# EAGLE board Photon-IMU-Shield-Panel-v10 (EAGLE 7.3.0), part 1 of 2
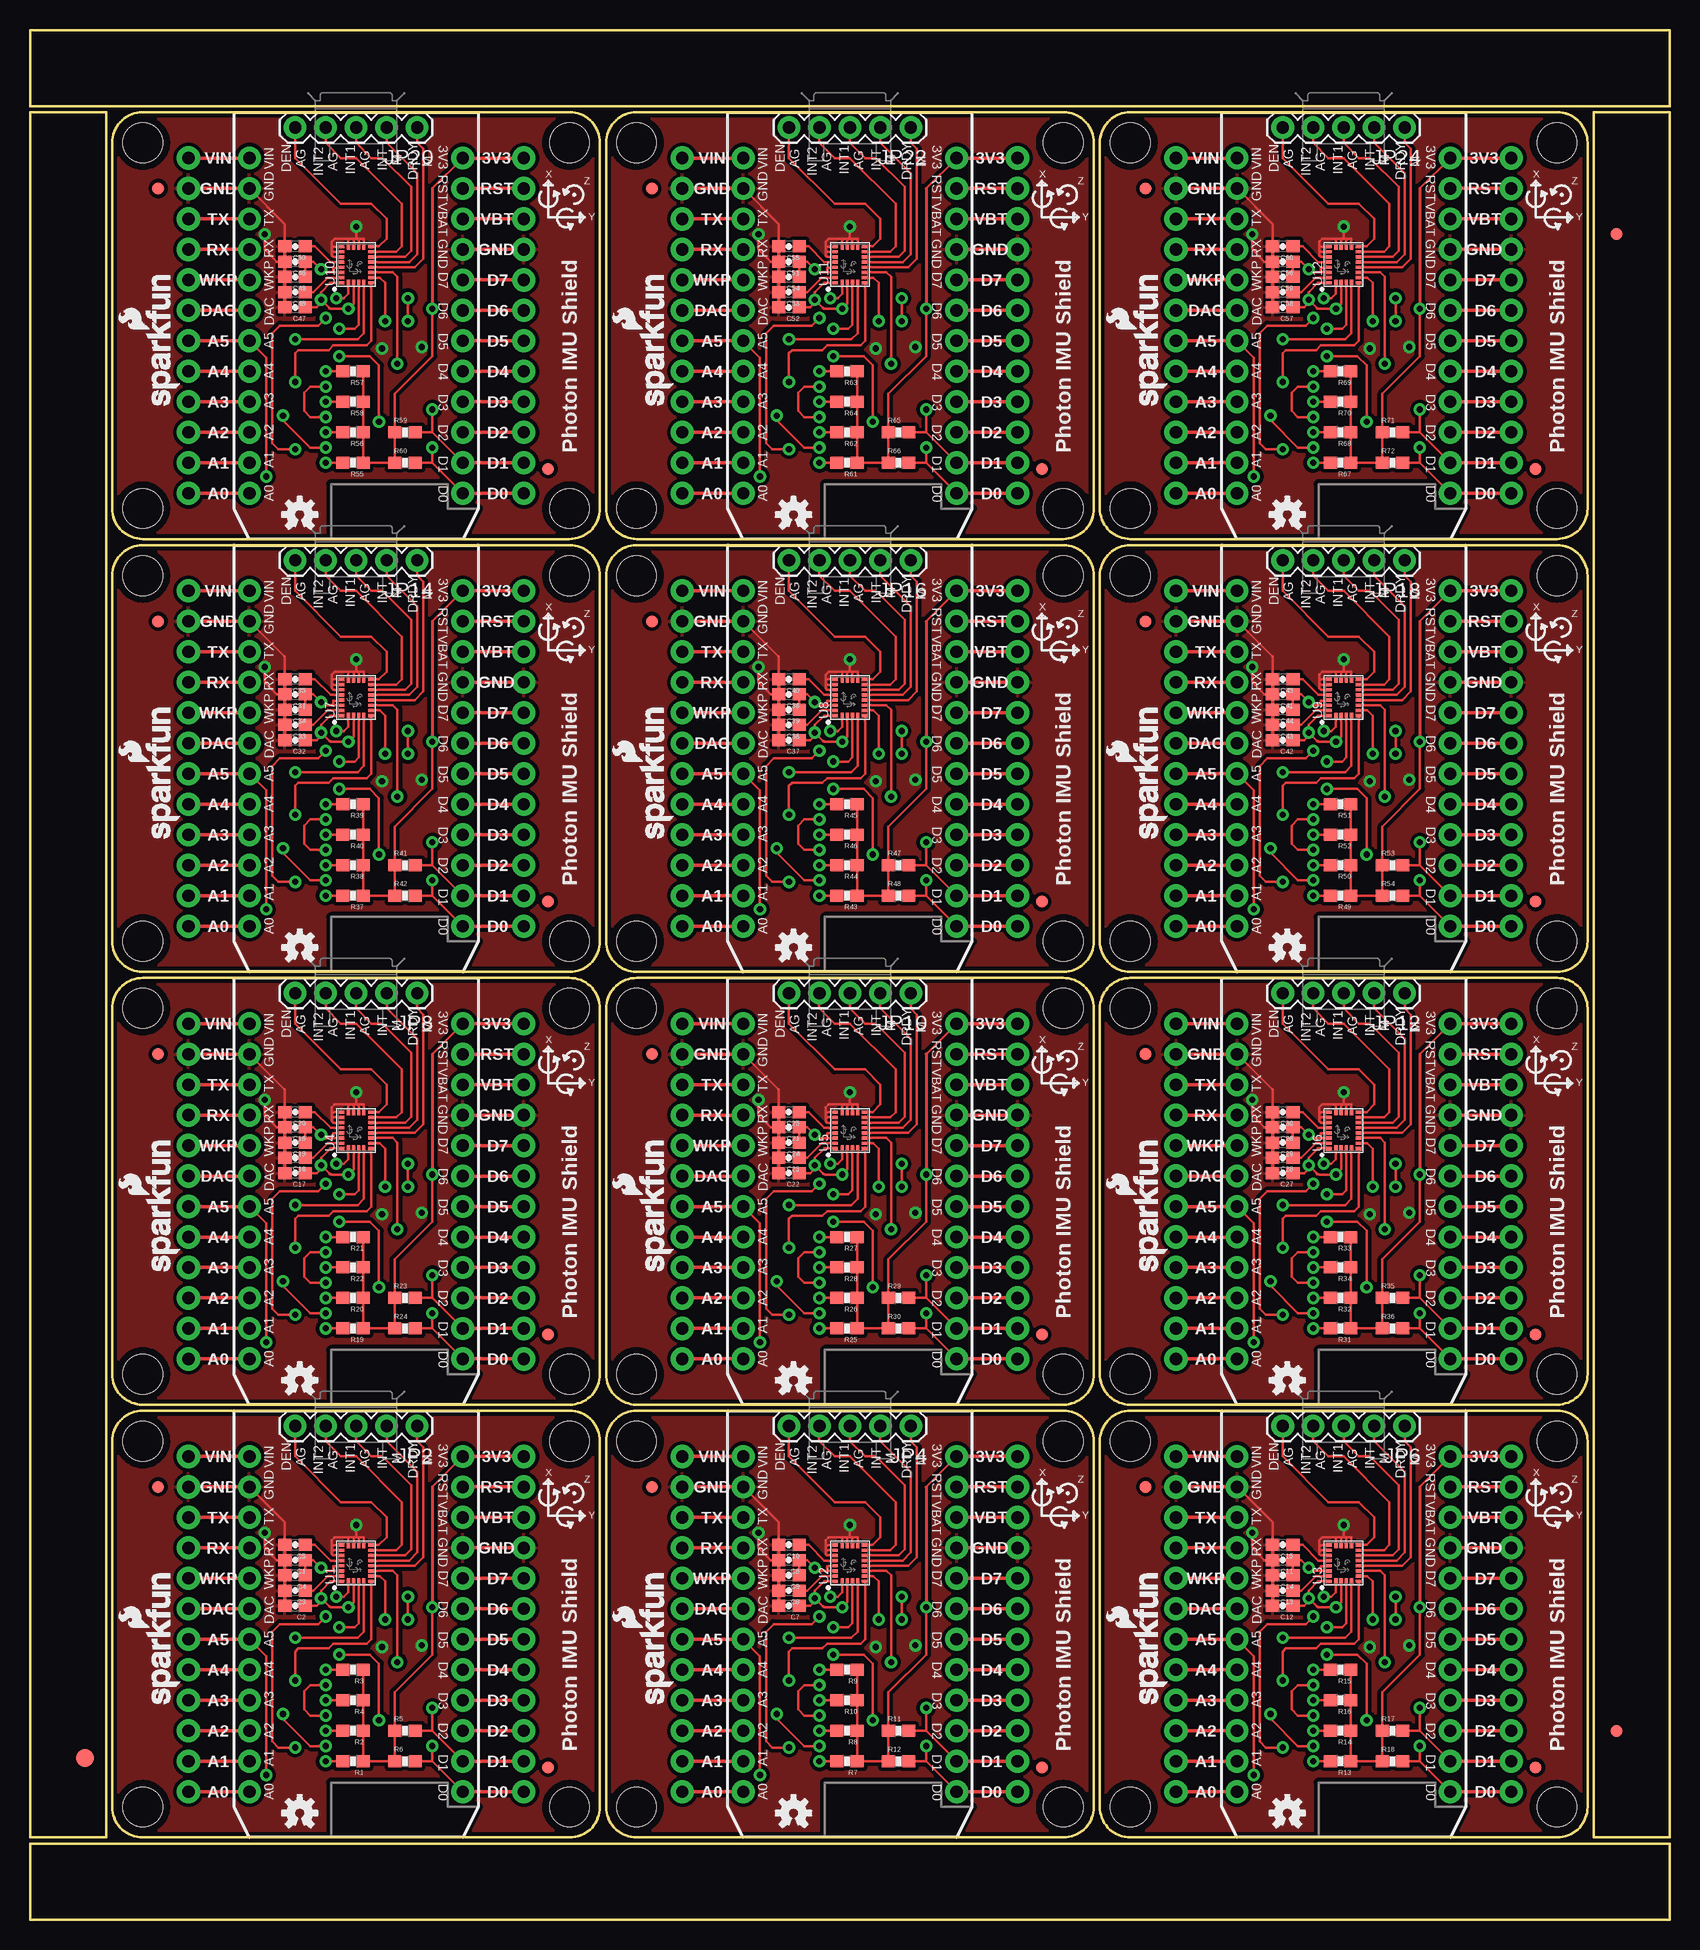
[diagram p0: board, top side]
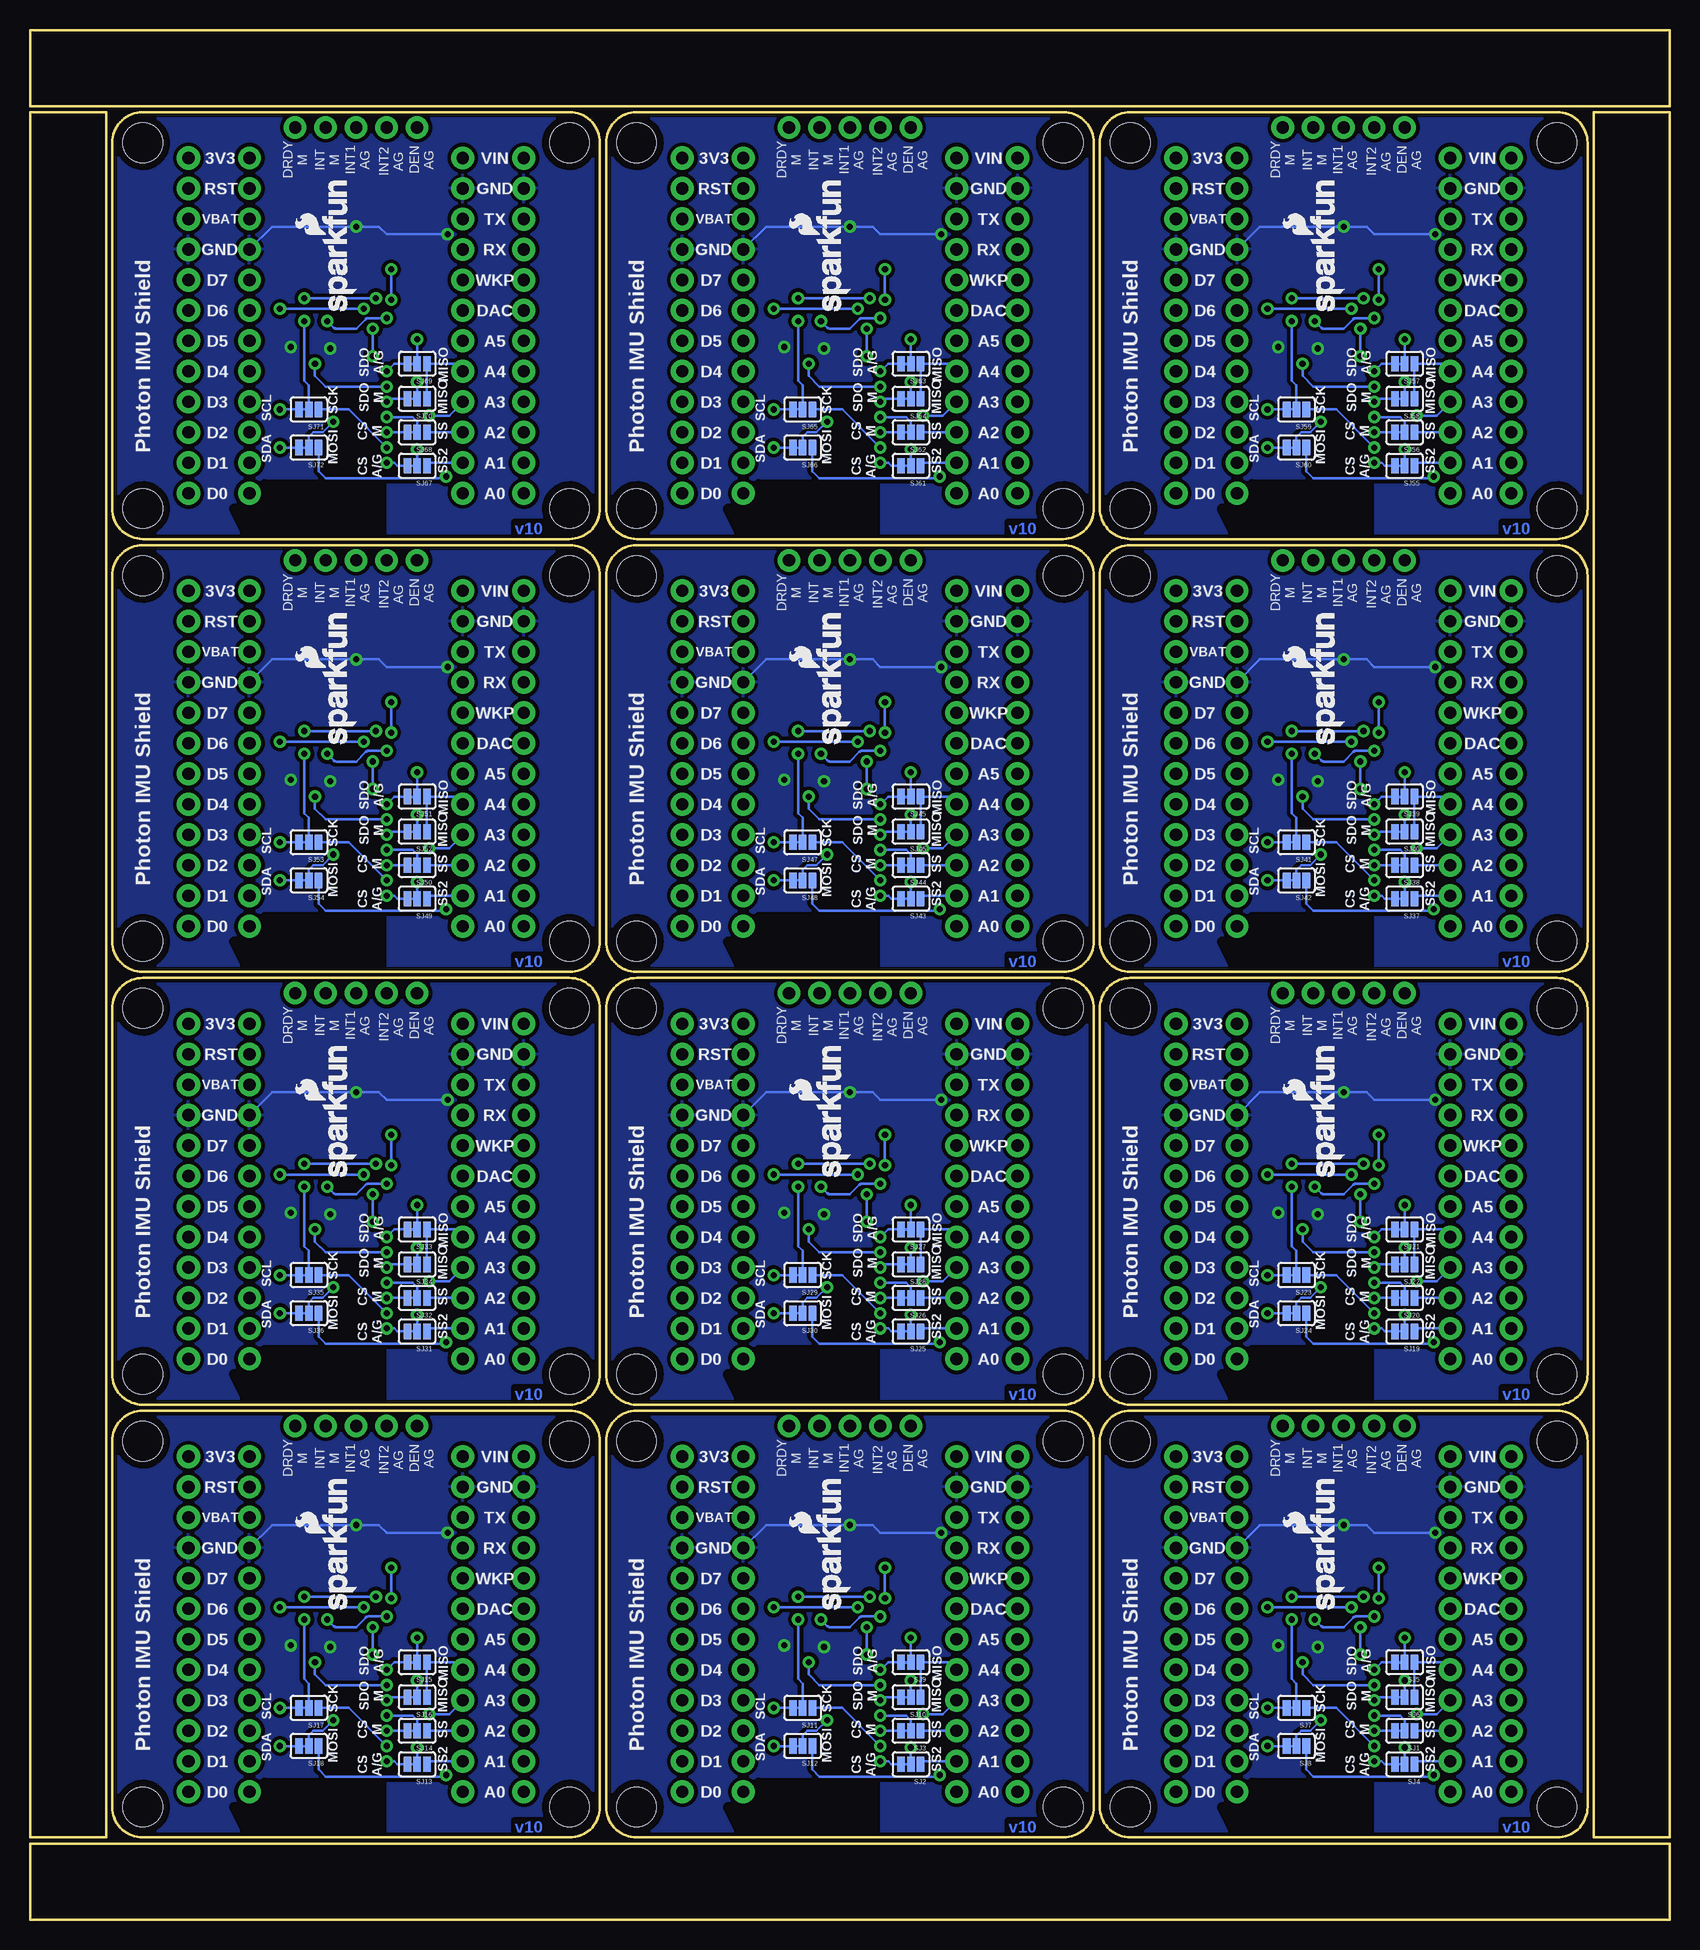
[diagram p1: board, bottom side, seen from below]

Size 136.65 x 157.48 mm. Coordinates in mm from the lower left corner, seen from the top.
Outline: 9.4,42.42 44.96,42.42 arc-90 47.5,39.88 47.5,9.4 arc-90 44.96,6.86 9.4,6.86 arc-90 6.86,9.4 6.86,39.88 arc-90 9.4,42.42
Outline: 50.55,42.42 86.11,42.42 arc-90 88.65,39.88 88.65,9.4 arc-90 86.11,6.86 50.55,6.86 arc-90 48.01,9.4 48.01,39.88 arc-90 50.55,42.42
Outline: 91.69,42.42 127.25,42.42 arc-90 129.79,39.88 129.79,9.4 arc-90 127.25,6.86 91.69,6.86 arc-90 89.15,9.4 89.15,39.88 arc-90 91.69,42.42
Outline: 9.4,78.49 44.96,78.49 arc-90 47.5,75.95 47.5,45.47 arc-90 44.96,42.93 9.4,42.93 arc-90 6.86,45.47 6.86,75.95 arc-90 9.4,78.49
Outline: 50.55,78.49 86.11,78.49 arc-90 88.65,75.95 88.65,45.47 arc-90 86.11,42.93 50.55,42.93 arc-90 48.01,45.47 48.01,75.95 arc-90 50.55,78.49
Outline: 91.69,78.49 127.25,78.49 arc-90 129.79,75.95 129.79,45.47 arc-90 127.25,42.93 91.69,42.93 arc-90 89.15,45.47 89.15,75.95 arc-90 91.69,78.49
Outline: 9.4,114.55 44.96,114.55 arc-90 47.5,112.01 47.5,81.53 arc-90 44.96,78.99 9.4,78.99 arc-90 6.86,81.53 6.86,112.01 arc-90 9.4,114.55
Outline: 50.55,114.55 86.11,114.55 arc-90 88.65,112.01 88.65,81.53 arc-90 86.11,78.99 50.55,78.99 arc-90 48.01,81.53 48.01,112.01 arc-90 50.55,114.55
Outline: 91.69,114.55 127.25,114.55 arc-90 129.79,112.01 129.79,81.53 arc-90 127.25,78.99 91.69,78.99 arc-90 89.15,81.53 89.15,112.01 arc-90 91.69,114.55
Outline: 9.4,150.62 44.96,150.62 arc-90 47.5,148.08 47.5,117.6 arc-90 44.96,115.06 9.4,115.06 arc-90 6.86,117.6 6.86,148.08 arc-90 9.4,150.62
Outline: 50.55,150.62 86.11,150.62 arc-90 88.65,148.08 88.65,117.6 arc-90 86.11,115.06 50.55,115.06 arc-90 48.01,117.6 48.01,148.08 arc-90 50.55,150.62
Outline: 91.69,150.62 127.25,150.62 arc-90 129.79,148.08 129.79,117.6 arc-90 127.25,115.06 91.69,115.06 arc-90 89.15,117.6 89.15,148.08 arc-90 91.69,150.62
Outline: 6.35,6.86 6.35,150.62 0,150.62 0,6.86 6.35,6.86
Outline: 0,0 136.65,0 136.65,6.35 0,6.35 0,0
Outline: 130.3,6.86 136.65,6.86 136.65,150.62 130.3,150.62 130.3,6.86
Outline: 136.65,157.48 0,157.48 0,151.13 136.65,151.13 136.65,157.48
Copper layers (1*16): Top 0.035mm / dielectric 1.5mm / Bottom 0.035mm
Design rules "SparkFun-2-layer": minimum track width 7mil, minimum drill 15mil, track to track 8mil, track to pad 8mil, pad to pad 8mil, via to via 8mil, smd to smd 8mil, copper to edge 8mil, drill to drill 8mil, minimum pad ring 12mil, minimum via ring 10mil, stop-mask expansion 4mil, vias tented up to drill 20mil, thermal gap 10mil

## Footprints (pad centres in the part's own frame; a part is rotated, then mirrored left to right if it is on the bottom)
0603-CAP = smd 1.1 x 1: 1 -0.85,0; 2 0.85,0
FIDUCIAL-1.5X3 = smd 1.5 x 1.5: 1 0,0
FIDUCIAL-1X2 = smd 1 x 1: 1 0,0
SPARK_PHOTON_TEMPLATE_WIDE = drill 1.016 pad 1.905: 1 1.27,31.75; 2 1.27,29.21; 3 1.27,26.67; 4 1.27,24.13; 5 1.27,21.59; 6 1.27,19.05; 7 1.27,16.51; 8 1.27,13.97; 9 1.27,11.43; 10 1.27,8.89; 11 1.27,6.35; 12 1.27,3.81; 13 19.05,3.81; 14 19.05,6.35; 15 19.05,8.89; 16 19.05,11.43; 17 19.05,13.97; 18 19.05,16.51; 19 19.05,19.05; 20 19.05,21.59; 21 19.05,24.13; 22 19.05,26.67; 23 19.05,29.21; 24 19.05,31.75 | drill 1.016 pad 1.93: 3V3 24.13,31.75; A0 -3.81,3.81; A1 -3.81,6.35; A2 -3.81,8.89; A3 -3.81,11.43; A4 -3.81,13.97; A5 -3.81,16.51; D0 24.13,3.81; D1 24.13,6.35; D2 24.13,8.89; D3 24.13,11.43; D4 24.13,13.97; D5 24.13,16.51; D6 24.13,19.05; D7 24.13,21.59; DAC -3.81,19.05; GND@0 -3.81,29.21; GND@2 24.13,24.13; RST 24.13,29.21; RX -3.81,24.13; TX -3.81,26.67; VBAT 24.13,26.67; VIN -3.81,31.75; WKP -3.81,21.59 | hole 3.302: -7.62,33.02; 27.94,33.02; -7.62,2.54; 27.94,2.54
1X05 = drill 1.016 pad 1.88: 1 0,0; 2 2.54,0; 3 5.08,0; 4 7.62,0; 5 10.16,0
0603-RES = smd 1.1 x 1: 1 -0.85,0; 2 0.85,0
PAD-JUMPER-3-2OF3_NC_BY_TRACE_YES_SILK_FULL_BOX = smd 0.635 x 1.27: 1 -0.813,0; 2 0,0; 3 0.813,0
LGA24-8X4 = smd 0.27 x 0.45: 1 -1.505,1.225; 6 -1.505,-1.225; 7 -1.075,-1.225; 8 -0.645,-1.225; 9 -0.215,-1.225; 10 0.215,-1.225; 11 0.645,-1.225; 12 1.075,-1.225; 13 1.505,-1.225; 18 1.505,1.225; 19 1.075,1.225; 20 0.645,1.225; 21 0.215,1.225; 22 -0.215,1.225; 23 -0.645,1.225; 24 -1.075,1.225 | smd 0.45 x 0.27: 2 -1.475,0.645; 3 -1.475,0.215; 4 -1.475,-0.215; 5 -1.475,-0.645; 14 1.475,-0.645; 15 1.475,-0.215; 16 1.475,0.215; 17 1.475,0.645

## Placement (x,y rotation side)
C1  0.1uF  [0603-CAP]  22.1,29.97 180 top
C2  0.1uF  [0603-CAP]  22.1,26.16 180 top
C3  0.1uF  [0603-CAP]  22.1,27.43 180 top
C4  10uF  [0603-CAP]  22.1,28.7 180 top
C5  10nF  [0603-CAP]  22.1,31.24 180 top
C6  0.1uF  [0603-CAP]  63.25,29.97 180 top
C7  0.1uF  [0603-CAP]  63.25,26.16 180 top
C8  0.1uF  [0603-CAP]  63.25,27.43 180 top
C9  10uF  [0603-CAP]  63.25,28.7 180 top
C10  10nF  [0603-CAP]  63.25,31.24 180 top
C11  0.1uF  [0603-CAP]  104.39,29.97 180 top
C12  0.1uF  [0603-CAP]  104.39,26.16 180 top
C13  0.1uF  [0603-CAP]  104.39,27.43 180 top
C14  10uF  [0603-CAP]  104.39,28.7 180 top
C15  10nF  [0603-CAP]  104.39,31.24 180 top
C16  0.1uF  [0603-CAP]  22.1,66.04 180 top
C17  0.1uF  [0603-CAP]  22.1,62.23 180 top
C18  0.1uF  [0603-CAP]  22.1,63.5 180 top
C19  10uF  [0603-CAP]  22.1,64.77 180 top
C20  10nF  [0603-CAP]  22.1,67.31 180 top
C21  0.1uF  [0603-CAP]  63.25,66.04 180 top
C22  0.1uF  [0603-CAP]  63.25,62.23 180 top
C23  0.1uF  [0603-CAP]  63.25,63.5 180 top
C24  10uF  [0603-CAP]  63.25,64.77 180 top
C25  10nF  [0603-CAP]  63.25,67.31 180 top
C26  0.1uF  [0603-CAP]  104.39,66.04 180 top
C27  0.1uF  [0603-CAP]  104.39,62.23 180 top
C28  0.1uF  [0603-CAP]  104.39,63.5 180 top
C29  10uF  [0603-CAP]  104.39,64.77 180 top
C30  10nF  [0603-CAP]  104.39,67.31 180 top
C31  0.1uF  [0603-CAP]  22.1,102.11 180 top
C32  0.1uF  [0603-CAP]  22.1,98.3 180 top
C33  0.1uF  [0603-CAP]  22.1,99.57 180 top
C34  10uF  [0603-CAP]  22.1,100.84 180 top
C35  10nF  [0603-CAP]  22.1,103.38 180 top
C36  0.1uF  [0603-CAP]  63.25,102.11 180 top
C37  0.1uF  [0603-CAP]  63.25,98.3 180 top
C38  0.1uF  [0603-CAP]  63.25,99.57 180 top
C39  10uF  [0603-CAP]  63.25,100.84 180 top
C40  10nF  [0603-CAP]  63.25,103.38 180 top
C41  0.1uF  [0603-CAP]  104.39,102.11 180 top
C42  0.1uF  [0603-CAP]  104.39,98.3 180 top
C43  0.1uF  [0603-CAP]  104.39,99.57 180 top
C44  10uF  [0603-CAP]  104.39,100.84 180 top
C45  10nF  [0603-CAP]  104.39,103.38 180 top
C46  0.1uF  [0603-CAP]  22.1,138.18 180 top
C47  0.1uF  [0603-CAP]  22.1,134.37 180 top
C48  0.1uF  [0603-CAP]  22.1,135.64 180 top
C49  10uF  [0603-CAP]  22.1,136.91 180 top
C50  10nF  [0603-CAP]  22.1,139.45 180 top
C51  0.1uF  [0603-CAP]  63.25,138.18 180 top
C52  0.1uF  [0603-CAP]  63.25,134.37 180 top
C53  0.1uF  [0603-CAP]  63.25,135.64 180 top
C54  10uF  [0603-CAP]  63.25,136.91 180 top
C55  10nF  [0603-CAP]  63.25,139.45 180 top
C56  0.1uF  [0603-CAP]  104.39,138.18 180 top
C57  0.1uF  [0603-CAP]  104.39,134.37 180 top
C58  0.1uF  [0603-CAP]  104.39,135.64 180 top
C59  10uF  [0603-CAP]  104.39,136.91 180 top
C60  10nF  [0603-CAP]  104.39,139.45 180 top
E$1  [FIDUCIAL-1.5X3]  4.57,13.46 0 top
E$4  [FIDUCIAL-1X2]  132.21,15.75 0 top
E$5  [FIDUCIAL-1X2]  132.21,140.46 180 top
FID1  FIDUCIAL1X2  [FIDUCIAL-1X2]  10.67,36.07 0 top
FID2  FIDUCIAL1X2  [FIDUCIAL-1X2]  43.18,12.7 0 top
FID3  FIDUCIAL1X2  [FIDUCIAL-1X2]  51.82,36.07 0 top
FID4  FIDUCIAL1X2  [FIDUCIAL-1X2]  84.33,12.7 0 top
FID5  FIDUCIAL1X2  [FIDUCIAL-1X2]  92.96,36.07 0 top
FID6  FIDUCIAL1X2  [FIDUCIAL-1X2]  125.48,12.7 0 top
FID7  FIDUCIAL1X2  [FIDUCIAL-1X2]  10.67,72.14 0 top
FID8  FIDUCIAL1X2  [FIDUCIAL-1X2]  43.18,48.77 0 top
FID9  FIDUCIAL1X2  [FIDUCIAL-1X2]  51.82,72.14 0 top
FID10  FIDUCIAL1X2  [FIDUCIAL-1X2]  84.33,48.77 0 top
FID11  FIDUCIAL1X2  [FIDUCIAL-1X2]  92.96,72.14 0 top
FID12  FIDUCIAL1X2  [FIDUCIAL-1X2]  125.48,48.77 0 top
FID13  FIDUCIAL1X2  [FIDUCIAL-1X2]  10.67,108.2 0 top
FID14  FIDUCIAL1X2  [FIDUCIAL-1X2]  43.18,84.84 0 top
FID15  FIDUCIAL1X2  [FIDUCIAL-1X2]  51.82,108.2 0 top
FID16  FIDUCIAL1X2  [FIDUCIAL-1X2]  84.33,84.84 0 top
FID17  FIDUCIAL1X2  [FIDUCIAL-1X2]  92.96,108.2 0 top
FID18  FIDUCIAL1X2  [FIDUCIAL-1X2]  125.48,84.84 0 top
FID19  FIDUCIAL1X2  [FIDUCIAL-1X2]  10.67,144.27 0 top
FID20  FIDUCIAL1X2  [FIDUCIAL-1X2]  43.18,120.9 0 top
FID21  FIDUCIAL1X2  [FIDUCIAL-1X2]  51.82,144.27 0 top
FID22  FIDUCIAL1X2  [FIDUCIAL-1X2]  84.33,120.9 0 top
FID23  FIDUCIAL1X2  [FIDUCIAL-1X2]  92.96,144.27 0 top
FID24  FIDUCIAL1X2  [FIDUCIAL-1X2]  125.48,120.9 0 top
JP1  SPARK_PHOTONTEMPLATE_WIDE  [SPARK_PHOTON_TEMPLATE_WIDE]  17.02,6.86 0 top
JP2  [1X05]  32.26,41.15 180 top
JP3  SPARK_PHOTONTEMPLATE_WIDE  [SPARK_PHOTON_TEMPLATE_WIDE]  58.17,6.86 0 top
JP4  [1X05]  73.41,41.15 180 top
JP5  SPARK_PHOTONTEMPLATE_WIDE  [SPARK_PHOTON_TEMPLATE_WIDE]  99.31,6.86 0 top
JP6  [1X05]  114.55,41.15 180 top
JP7  SPARK_PHOTONTEMPLATE_WIDE  [SPARK_PHOTON_TEMPLATE_WIDE]  17.02,42.93 0 top
JP8  [1X05]  32.26,77.22 180 top
JP9  SPARK_PHOTONTEMPLATE_WIDE  [SPARK_PHOTON_TEMPLATE_WIDE]  58.17,42.93 0 top
JP10  [1X05]  73.41,77.22 180 top
JP11  SPARK_PHOTONTEMPLATE_WIDE  [SPARK_PHOTON_TEMPLATE_WIDE]  99.31,42.93 0 top
JP12  [1X05]  114.55,77.22 180 top
JP13  SPARK_PHOTONTEMPLATE_WIDE  [SPARK_PHOTON_TEMPLATE_WIDE]  17.02,78.99 0 top
JP14  [1X05]  32.26,113.28 180 top
JP15  SPARK_PHOTONTEMPLATE_WIDE  [SPARK_PHOTON_TEMPLATE_WIDE]  58.17,78.99 0 top
JP16  [1X05]  73.41,113.28 180 top
JP17  SPARK_PHOTONTEMPLATE_WIDE  [SPARK_PHOTON_TEMPLATE_WIDE]  99.31,78.99 0 top
JP18  [1X05]  114.55,113.28 180 top
JP19  SPARK_PHOTONTEMPLATE_WIDE  [SPARK_PHOTON_TEMPLATE_WIDE]  17.02,115.06 0 top
JP20  [1X05]  32.26,149.35 180 top
JP21  SPARK_PHOTONTEMPLATE_WIDE  [SPARK_PHOTON_TEMPLATE_WIDE]  58.17,115.06 0 top
JP22  [1X05]  73.41,149.35 180 top
JP23  SPARK_PHOTONTEMPLATE_WIDE  [SPARK_PHOTON_TEMPLATE_WIDE]  99.31,115.06 0 top
JP24  [1X05]  114.55,149.35 180 top
LOGO1  SFE_LOGO_NAME_FLAME.1_INCH  [SFE_LOGO_NAME_FLAME_.1]  12.57,17.53 90 top
LOGO2  OSHW-LOGOS  [OSHW-LOGO-S]  22.48,8.89 0 top
LOGO3  OSHW-LOGOS  [OSHW-LOGO-S]  63.63,8.89 0 top
LOGO4  SFE_LOGO_NAME_FLAME.1_INCH  [SFE_LOGO_NAME_FLAME_.1]  53.72,17.53 90 top
LOGO5  OSHW-LOGOS  [OSHW-LOGO-S]  104.78,8.89 0 top
LOGO6  SFE_LOGO_NAME_FLAME.1_INCH  [SFE_LOGO_NAME_FLAME_.1]  94.87,17.53 90 top
LOGO7  OSHW-LOGOS  [OSHW-LOGO-S]  22.48,44.96 0 top
LOGO8  SFE_LOGO_NAME_FLAME.1_INCH  [SFE_LOGO_NAME_FLAME_.1]  12.57,53.59 90 top
LOGO9  OSHW-LOGOS  [OSHW-LOGO-S]  63.63,44.96 0 top
LOGO10  SFE_LOGO_NAME_FLAME.1_INCH  [SFE_LOGO_NAME_FLAME_.1]  53.72,53.59 90 top
LOGO11  OSHW-LOGOS  [OSHW-LOGO-S]  104.78,44.96 0 top
LOGO12  SFE_LOGO_NAME_FLAME.1_INCH  [SFE_LOGO_NAME_FLAME_.1]  94.87,53.59 90 top
LOGO13  OSHW-LOGOS  [OSHW-LOGO-S]  22.48,81.03 0 top
LOGO14  SFE_LOGO_NAME_FLAME.1_INCH  [SFE_LOGO_NAME_FLAME_.1]  12.57,89.66 90 top
LOGO15  OSHW-LOGOS  [OSHW-LOGO-S]  63.63,81.03 0 top
LOGO16  SFE_LOGO_NAME_FLAME.1_INCH  [SFE_LOGO_NAME_FLAME_.1]  53.72,89.66 90 top
LOGO17  OSHW-LOGOS  [OSHW-LOGO-S]  104.78,81.03 0 top
LOGO18  SFE_LOGO_NAME_FLAME.1_INCH  [SFE_LOGO_NAME_FLAME_.1]  94.87,89.66 90 top
LOGO19  OSHW-LOGOS  [OSHW-LOGO-S]  22.48,117.09 0 top
LOGO20  SFE_LOGO_NAME_FLAME.1_INCH  [SFE_LOGO_NAME_FLAME_.1]  12.57,125.73 90 top
LOGO21  OSHW-LOGOS  [OSHW-LOGO-S]  63.63,117.09 0 top
LOGO22  SFE_LOGO_NAME_FLAME.1_INCH  [SFE_LOGO_NAME_FLAME_.1]  53.72,125.73 90 top
LOGO23  OSHW-LOGOS  [OSHW-LOGO-S]  104.78,117.09 0 top
LOGO24  SFE_LOGO_NAME_FLAME.1_INCH  [SFE_LOGO_NAME_FLAME_.1]  94.87,125.73 90 top
R1  10K  [0603-RES]  26.92,13.21 180 top
R2  10K  [0603-RES]  26.92,15.75 180 top
R3  10K  [0603-RES]  26.92,20.83 180 top
R4  10K  [0603-RES]  26.92,18.29 180 top
R5  10K  [0603-RES]  31.24,15.75 0 top
R6  10K  [0603-RES]  31.24,13.21 0 top
R7  10K  [0603-RES]  68.07,13.21 180 top
R8  10K  [0603-RES]  68.07,15.75 180 top
R9  10K  [0603-RES]  68.07,20.83 180 top
R10  10K  [0603-RES]  68.07,18.29 180 top
R11  10K  [0603-RES]  72.39,15.75 0 top
R12  10K  [0603-RES]  72.39,13.21 0 top
R13  10K  [0603-RES]  109.22,13.21 180 top
R14  10K  [0603-RES]  109.22,15.75 180 top
R15  10K  [0603-RES]  109.22,20.83 180 top
R16  10K  [0603-RES]  109.22,18.29 180 top
R17  10K  [0603-RES]  113.54,15.75 0 top
R18  10K  [0603-RES]  113.54,13.21 0 top
R19  10K  [0603-RES]  26.92,49.28 180 top
R20  10K  [0603-RES]  26.92,51.82 180 top
R21  10K  [0603-RES]  26.92,56.9 180 top
R22  10K  [0603-RES]  26.92,54.36 180 top
R23  10K  [0603-RES]  31.24,51.82 0 top
R24  10K  [0603-RES]  31.24,49.28 0 top
R25  10K  [0603-RES]  68.07,49.28 180 top
R26  10K  [0603-RES]  68.07,51.82 180 top
R27  10K  [0603-RES]  68.07,56.9 180 top
R28  10K  [0603-RES]  68.07,54.36 180 top
R29  10K  [0603-RES]  72.39,51.82 0 top
R30  10K  [0603-RES]  72.39,49.28 0 top
R31  10K  [0603-RES]  109.22,49.28 180 top
R32  10K  [0603-RES]  109.22,51.82 180 top
R33  10K  [0603-RES]  109.22,56.9 180 top
R34  10K  [0603-RES]  109.22,54.36 180 top
R35  10K  [0603-RES]  113.54,51.82 0 top
R36  10K  [0603-RES]  113.54,49.28 0 top
R37  10K  [0603-RES]  26.92,85.34 180 top
R38  10K  [0603-RES]  26.92,87.88 180 top
R39  10K  [0603-RES]  26.92,92.96 180 top
R40  10K  [0603-RES]  26.92,90.42 180 top
R41  10K  [0603-RES]  31.24,87.88 0 top
R42  10K  [0603-RES]  31.24,85.34 0 top
R43  10K  [0603-RES]  68.07,85.34 180 top
R44  10K  [0603-RES]  68.07,87.88 180 top
R45  10K  [0603-RES]  68.07,92.96 180 top
R46  10K  [0603-RES]  68.07,90.42 180 top
R47  10K  [0603-RES]  72.39,87.88 0 top
R48  10K  [0603-RES]  72.39,85.34 0 top
R49  10K  [0603-RES]  109.22,85.34 180 top
R50  10K  [0603-RES]  109.22,87.88 180 top
R51  10K  [0603-RES]  109.22,92.96 180 top
R52  10K  [0603-RES]  109.22,90.42 180 top
R53  10K  [0603-RES]  113.54,87.88 0 top
R54  10K  [0603-RES]  113.54,85.34 0 top
R55  10K  [0603-RES]  26.92,121.41 180 top
R56  10K  [0603-RES]  26.92,123.95 180 top
R57  10K  [0603-RES]  26.92,129.03 180 top
R58  10K  [0603-RES]  26.92,126.49 180 top
R59  10K  [0603-RES]  31.24,123.95 0 top
R60  10K  [0603-RES]  31.24,121.41 0 top
R61  10K  [0603-RES]  68.07,121.41 180 top
R62  10K  [0603-RES]  68.07,123.95 180 top
R63  10K  [0603-RES]  68.07,129.03 180 top
R64  10K  [0603-RES]  68.07,126.49 180 top
R65  10K  [0603-RES]  72.39,123.95 0 top
R66  10K  [0603-RES]  72.39,121.41 0 top
R67  10K  [0603-RES]  109.22,121.41 180 top
R68  10K  [0603-RES]  109.22,123.95 180 top
R69  10K  [0603-RES]  109.22,129.03 180 top
R70  10K  [0603-RES]  109.22,126.49 180 top
R71  10K  [0603-RES]  113.54,123.95 0 top
R72  10K  [0603-RES]  113.54,121.41 0 top
SJ1  [PAD-JUMPER-3-2OF3_NC_BY_TRACE_YES_SILK_FULL_BOX]  22.1,15.75 180 bottom
SJ2  [PAD-JUMPER-3-2OF3_NC_BY_TRACE_YES_SILK_FULL_BOX]  63.25,12.95 180 bottom
SJ3  [PAD-JUMPER-3-2OF3_NC_BY_TRACE_YES_SILK_FULL_BOX]  63.25,15.75 180 bottom
SJ4  [PAD-JUMPER-3-2OF3_NC_BY_TRACE_YES_SILK_FULL_BOX]  22.1,12.95 180 bottom
SJ5  [PAD-JUMPER-3-2OF3_NC_BY_TRACE_YES_SILK_FULL_BOX]  22.1,21.46 180 bottom
SJ6  [PAD-JUMPER-3-2OF3_NC_BY_TRACE_YES_SILK_FULL_BOX]  22.1,18.54 180 bottom
SJ7  [PAD-JUMPER-3-2OF3_NC_BY_TRACE_YES_SILK_FULL_BOX]  31.11,17.65 180 bottom
SJ8  [PAD-JUMPER-3-2OF3_NC_BY_TRACE_YES_SILK_FULL_BOX]  31.11,14.48 180 bottom
SJ9  [PAD-JUMPER-3-2OF3_NC_BY_TRACE_YES_SILK_FULL_BOX]  63.25,21.46 180 bottom
SJ10  [PAD-JUMPER-3-2OF3_NC_BY_TRACE_YES_SILK_FULL_BOX]  63.25,18.54 180 bottom
SJ11  [PAD-JUMPER-3-2OF3_NC_BY_TRACE_YES_SILK_FULL_BOX]  72.26,17.65 180 bottom
SJ12  [PAD-JUMPER-3-2OF3_NC_BY_TRACE_YES_SILK_FULL_BOX]  72.26,14.48 180 bottom
SJ13  [PAD-JUMPER-3-2OF3_NC_BY_TRACE_YES_SILK_FULL_BOX]  104.39,12.95 180 bottom
SJ14  [PAD-JUMPER-3-2OF3_NC_BY_TRACE_YES_SILK_FULL_BOX]  104.39,15.75 180 bottom
SJ15  [PAD-JUMPER-3-2OF3_NC_BY_TRACE_YES_SILK_FULL_BOX]  104.39,21.46 180 bottom
SJ16  [PAD-JUMPER-3-2OF3_NC_BY_TRACE_YES_SILK_FULL_BOX]  104.39,18.54 180 bottom
SJ17  [PAD-JUMPER-3-2OF3_NC_BY_TRACE_YES_SILK_FULL_BOX]  113.41,17.65 180 bottom
SJ18  [PAD-JUMPER-3-2OF3_NC_BY_TRACE_YES_SILK_FULL_BOX]  113.41,14.48 180 bottom
SJ19  [PAD-JUMPER-3-2OF3_NC_BY_TRACE_YES_SILK_FULL_BOX]  22.1,49.02 180 bottom
SJ20  [PAD-JUMPER-3-2OF3_NC_BY_TRACE_YES_SILK_FULL_BOX]  22.1,51.82 180 bottom
SJ21  [PAD-JUMPER-3-2OF3_NC_BY_TRACE_YES_SILK_FULL_BOX]  22.1,57.53 180 bottom
SJ22  [PAD-JUMPER-3-2OF3_NC_BY_TRACE_YES_SILK_FULL_BOX]  22.1,54.61 180 bottom
SJ23  [PAD-JUMPER-3-2OF3_NC_BY_TRACE_YES_SILK_FULL_BOX]  31.11,53.72 180 bottom
SJ24  [PAD-JUMPER-3-2OF3_NC_BY_TRACE_YES_SILK_FULL_BOX]  31.11,50.55 180 bottom
SJ25  [PAD-JUMPER-3-2OF3_NC_BY_TRACE_YES_SILK_FULL_BOX]  63.25,49.02 180 bottom
SJ26  [PAD-JUMPER-3-2OF3_NC_BY_TRACE_YES_SILK_FULL_BOX]  63.25,51.82 180 bottom
SJ27  [PAD-JUMPER-3-2OF3_NC_BY_TRACE_YES_SILK_FULL_BOX]  63.25,57.53 180 bottom
SJ28  [PAD-JUMPER-3-2OF3_NC_BY_TRACE_YES_SILK_FULL_BOX]  63.25,54.61 180 bottom
SJ29  [PAD-JUMPER-3-2OF3_NC_BY_TRACE_YES_SILK_FULL_BOX]  72.26,53.72 180 bottom
SJ30  [PAD-JUMPER-3-2OF3_NC_BY_TRACE_YES_SILK_FULL_BOX]  72.26,50.55 180 bottom
SJ31  [PAD-JUMPER-3-2OF3_NC_BY_TRACE_YES_SILK_FULL_BOX]  104.39,49.02 180 bottom
SJ32  [PAD-JUMPER-3-2OF3_NC_BY_TRACE_YES_SILK_FULL_BOX]  104.39,51.82 180 bottom
SJ33  [PAD-JUMPER-3-2OF3_NC_BY_TRACE_YES_SILK_FULL_BOX]  104.39,57.53 180 bottom
SJ34  [PAD-JUMPER-3-2OF3_NC_BY_TRACE_YES_SILK_FULL_BOX]  104.39,54.61 180 bottom
SJ35  [PAD-JUMPER-3-2OF3_NC_BY_TRACE_YES_SILK_FULL_BOX]  113.41,53.72 180 bottom
SJ36  [PAD-JUMPER-3-2OF3_NC_BY_TRACE_YES_SILK_FULL_BOX]  113.41,50.55 180 bottom
SJ37  [PAD-JUMPER-3-2OF3_NC_BY_TRACE_YES_SILK_FULL_BOX]  22.1,85.09 180 bottom
SJ38  [PAD-JUMPER-3-2OF3_NC_BY_TRACE_YES_SILK_FULL_BOX]  22.1,87.88 180 bottom
SJ39  [PAD-JUMPER-3-2OF3_NC_BY_TRACE_YES_SILK_FULL_BOX]  22.1,93.6 180 bottom
SJ40  [PAD-JUMPER-3-2OF3_NC_BY_TRACE_YES_SILK_FULL_BOX]  22.1,90.68 180 bottom
SJ41  [PAD-JUMPER-3-2OF3_NC_BY_TRACE_YES_SILK_FULL_BOX]  31.11,89.79 180 bottom
SJ42  [PAD-JUMPER-3-2OF3_NC_BY_TRACE_YES_SILK_FULL_BOX]  31.11,86.61 180 bottom
SJ43  [PAD-JUMPER-3-2OF3_NC_BY_TRACE_YES_SILK_FULL_BOX]  63.25,85.09 180 bottom
SJ44  [PAD-JUMPER-3-2OF3_NC_BY_TRACE_YES_SILK_FULL_BOX]  63.25,87.88 180 bottom
SJ45  [PAD-JUMPER-3-2OF3_NC_BY_TRACE_YES_SILK_FULL_BOX]  63.25,93.6 180 bottom
SJ46  [PAD-JUMPER-3-2OF3_NC_BY_TRACE_YES_SILK_FULL_BOX]  63.25,90.68 180 bottom
SJ47  [PAD-JUMPER-3-2OF3_NC_BY_TRACE_YES_SILK_FULL_BOX]  72.26,89.79 180 bottom
SJ48  [PAD-JUMPER-3-2OF3_NC_BY_TRACE_YES_SILK_FULL_BOX]  72.26,86.61 180 bottom
SJ49  [PAD-JUMPER-3-2OF3_NC_BY_TRACE_YES_SILK_FULL_BOX]  104.39,85.09 180 bottom
SJ50  [PAD-JUMPER-3-2OF3_NC_BY_TRACE_YES_SILK_FULL_BOX]  104.39,87.88 180 bottom
SJ51  [PAD-JUMPER-3-2OF3_NC_BY_TRACE_YES_SILK_FULL_BOX]  104.39,93.6 180 bottom
SJ52  [PAD-JUMPER-3-2OF3_NC_BY_TRACE_YES_SILK_FULL_BOX]  104.39,90.68 180 bottom
SJ53  [PAD-JUMPER-3-2OF3_NC_BY_TRACE_YES_SILK_FULL_BOX]  113.41,89.79 180 bottom
SJ54  [PAD-JUMPER-3-2OF3_NC_BY_TRACE_YES_SILK_FULL_BOX]  113.41,86.61 180 bottom
SJ55  [PAD-JUMPER-3-2OF3_NC_BY_TRACE_YES_SILK_FULL_BOX]  22.1,121.16 180 bottom
SJ56  [PAD-JUMPER-3-2OF3_NC_BY_TRACE_YES_SILK_FULL_BOX]  22.1,123.95 180 bottom
SJ57  [PAD-JUMPER-3-2OF3_NC_BY_TRACE_YES_SILK_FULL_BOX]  22.1,129.67 180 bottom
SJ58  [PAD-JUMPER-3-2OF3_NC_BY_TRACE_YES_SILK_FULL_BOX]  22.1,126.75 180 bottom
SJ59  [PAD-JUMPER-3-2OF3_NC_BY_TRACE_YES_SILK_FULL_BOX]  31.11,125.86 180 bottom
SJ60  [PAD-JUMPER-3-2OF3_NC_BY_TRACE_YES_SILK_FULL_BOX]  31.11,122.68 180 bottom
SJ61  [PAD-JUMPER-3-2OF3_NC_BY_TRACE_YES_SILK_FULL_BOX]  63.25,121.16 180 bottom
SJ62  [PAD-JUMPER-3-2OF3_NC_BY_TRACE_YES_SILK_FULL_BOX]  63.25,123.95 180 bottom
SJ63  [PAD-JUMPER-3-2OF3_NC_BY_TRACE_YES_SILK_FULL_BOX]  63.25,129.67 180 bottom
SJ64  [PAD-JUMPER-3-2OF3_NC_BY_TRACE_YES_SILK_FULL_BOX]  63.25,126.75 180 bottom
SJ65  [PAD-JUMPER-3-2OF3_NC_BY_TRACE_YES_SILK_FULL_BOX]  72.26,125.86 180 bottom
SJ66  [PAD-JUMPER-3-2OF3_NC_BY_TRACE_YES_SILK_FULL_BOX]  72.26,122.68 180 bottom
SJ67  [PAD-JUMPER-3-2OF3_NC_BY_TRACE_YES_SILK_FULL_BOX]  104.39,121.16 180 bottom
SJ68  [PAD-JUMPER-3-2OF3_NC_BY_TRACE_YES_SILK_FULL_BOX]  104.39,123.95 180 bottom
SJ69  [PAD-JUMPER-3-2OF3_NC_BY_TRACE_YES_SILK_FULL_BOX]  104.39,129.67 180 bottom
SJ70  [PAD-JUMPER-3-2OF3_NC_BY_TRACE_YES_SILK_FULL_BOX]  104.39,126.75 180 bottom
SJ71  [PAD-JUMPER-3-2OF3_NC_BY_TRACE_YES_SILK_FULL_BOX]  113.41,125.86 180 bottom
SJ72  [PAD-JUMPER-3-2OF3_NC_BY_TRACE_YES_SILK_FULL_BOX]  113.41,122.68 180 bottom
U1  LSM9DS1  [LGA24-8X4]  27.18,29.72 90 top
U2  LSM9DS1  [LGA24-8X4]  68.33,29.72 90 top
U3  LSM9DS1  [LGA24-8X4]  109.47,29.72 90 top
U4  LSM9DS1  [LGA24-8X4]  27.18,65.79 90 top
U5  LSM9DS1  [LGA24-8X4]  68.33,65.79 90 top
U6  LSM9DS1  [LGA24-8X4]  109.47,65.79 90 top
U7  LSM9DS1  [LGA24-8X4]  27.18,101.85 90 top
U8  LSM9DS1  [LGA24-8X4]  68.33,101.85 90 top
U9  LSM9DS1  [LGA24-8X4]  109.47,101.85 90 top
U10  LSM9DS1  [LGA24-8X4]  27.18,137.92 90 top
U11  LSM9DS1  [LGA24-8X4]  68.33,137.92 90 top
U12  LSM9DS1  [LGA24-8X4]  109.47,137.92 90 top
U$1  [SFE_LOGO_NAME_FLAME_.1]  68.2,25.4 90 bottom
U$2  [SFE_LOGO_NAME_FLAME_.1]  109.35,25.4 90 bottom
U$3  [SFE_LOGO_NAME_FLAME_.1]  27.05,61.47 90 bottom
U$4  [SFE_LOGO_NAME_FLAME_.1]  68.2,61.47 90 bottom
U$5  [SFE_LOGO_NAME_FLAME_.1]  27.05,25.4 90 bottom
U$6  [SFE_LOGO_NAME_FLAME_.1]  109.35,61.47 90 bottom
U$7  [SFE_LOGO_NAME_FLAME_.1]  27.05,97.54 90 bottom
U$8  [SFE_LOGO_NAME_FLAME_.1]  68.2,97.54 90 bottom
U$9  [SFE_LOGO_NAME_FLAME_.1]  109.35,97.54 90 bottom
U$10  [SFE_LOGO_NAME_FLAME_.1]  27.05,133.6 90 bottom
U$11  [SFE_LOGO_NAME_FLAME_.1]  68.2,133.6 90 bottom
U$12  [SFE_LOGO_NAME_FLAME_.1]  109.35,133.6 90 bottom

## Library data of the parts
C1-C3 C6-C8 C11-C13 C16-C18 C21-C23 C26-C28 C31-C33 C36-C38 C41-C43 C46-C48 C51-C53 C56-C58 = SparkFun-Capacitors; PROD_ID: CAP-00810
C4 C9 C14 C19 C24 C29 C34 C39 C44 C49 C54 C59 = SparkFun-Capacitors; PROD_ID: CAP-11015
C5 C10 C15 C20 C25 C30 C35 C40 C45 C50 C55 C60 = SparkFun-Capacitors; PROD_ID: CAP-00867
E$1 = SparkFun-Retired
E$4 E$5 FID1-FID24 LOGO1-LOGO24 U$1-U$12 = SparkFun-Aesthetics
JP1 JP3 JP5 JP7 JP9 JP11 JP13 JP15 JP17 JP19 JP21 JP23 = template_temp
JP2 JP4 JP6 JP8 JP10 JP12 JP14 JP16 JP18 JP20 JP22 JP24 = SparkFun-Connectors
R1-R72 = SparkFun-Resistors; PROD_ID: RES-00824
SJ1-SJ72 = SparkFun-Passives
U1-U12 = LSM9DS1_temp; PROD_ID: IC-12536

## Nets
CS_A/G: R1.2 SJ4.2 SJ4.3 U1.7
CS_A/G1: R7.2 SJ2.2 SJ2.3 U2.7
CS_A/G2: R13.2 SJ13.2 SJ13.3 U3.7
CS_A/G3: R19.2 SJ19.2 SJ19.3 U4.7
CS_A/G4: R25.2 SJ25.2 SJ25.3 U5.7
CS_A/G5: R31.2 SJ31.2 SJ31.3 U6.7
CS_A/G6: R37.2 SJ37.2 SJ37.3 U7.7
CS_A/G7: R43.2 SJ43.2 SJ43.3 U8.7
CS_A/G8: R49.2 SJ49.2 SJ49.3 U9.7
CS_A/G9: R55.2 SJ55.2 SJ55.3 U10.7
CS_A/G10: R61.2 SJ61.2 SJ61.3 U11.7
CS_A/G11: R67.2 SJ67.2 SJ67.3 U12.7
CS_M: R2.2 SJ1.2 SJ1.3 U1.8
CS_M1: R8.2 SJ3.2 SJ3.3 U2.8
CS_M2: R14.2 SJ14.2 SJ14.3 U3.8
CS_M3: R20.2 SJ20.2 SJ20.3 U4.8
CS_M4: R26.2 SJ26.2 SJ26.3 U5.8
CS_M5: R32.2 SJ32.2 SJ32.3 U6.8
CS_M6: R38.2 SJ38.2 SJ38.3 U7.8
CS_M7: R44.2 SJ44.2 SJ44.3 U8.8
CS_M8: R50.2 SJ50.2 SJ50.3 U9.8
CS_M9: R56.2 SJ56.2 SJ56.3 U10.8
CS_M10: R62.2 SJ62.2 SJ62.3 U11.8
CS_M11: R68.2 SJ68.2 SJ68.3 U12.8
DEN_A/G: JP2.5 U1.13
DEN_A/G1: JP4.5 U2.13
DEN_A/G2: JP6.5 U3.13
DEN_A/G3: JP8.5 U4.13
DEN_A/G4: JP10.5 U5.13
DEN_A/G5: JP12.5 U6.13
DEN_A/G6: JP14.5 U7.13
DEN_A/G7: JP16.5 U8.13
DEN_A/G8: JP18.5 U9.13
DEN_A/G9: JP20.5 U10.13
DEN_A/G10: JP22.5 U11.13
DEN_A/G11: JP24.5 U12.13
DRDY_M: JP2.1 U1.9
DRDY_M1: JP4.1 U2.9
DRDY_M2: JP6.1 U3.9
DRDY_M3: JP8.1 U4.9
DRDY_M4: JP10.1 U5.9
DRDY_M5: JP12.1 U6.9
DRDY_M6: JP14.1 U7.9
DRDY_M7: JP16.1 U8.9
DRDY_M8: JP18.1 U9.9
DRDY_M9: JP20.1 U10.9
DRDY_M10: JP22.1 U11.9
DRDY_M11: JP24.1 U12.9
GND: C1.2 C2.2 C3.2 C4.2 C5.2 JP1.2 JP1.21 JP1.GND@0 JP1.GND@2 U1.14 U1.15 U1.16 U1.17 U1.18 U1.19 U1.20
GND1: C6.2 C7.2 C8.2 C9.2 C10.2 JP3.2 JP3.21 JP3.GND@0 JP3.GND@2 U2.14 U2.15 U2.16 U2.17 U2.18 U2.19 U2.20
GND2: C11.2 C12.2 C13.2 C14.2 C15.2 JP5.2 JP5.21 JP5.GND@0 JP5.GND@2 U3.14 U3.15 U3.16 U3.17 U3.18 U3.19 U3.20
GND3: C16.2 C17.2 C18.2 C19.2 C20.2 JP7.2 JP7.21 JP7.GND@0 JP7.GND@2 U4.14 U4.15 U4.16 U4.17 U4.18 U4.19 U4.20
GND4: C21.2 C22.2 C23.2 C24.2 C25.2 JP9.2 JP9.21 JP9.GND@0 JP9.GND@2 U5.14 U5.15 U5.16 U5.17 U5.18 U5.19 U5.20
GND5: C26.2 C27.2 C28.2 C29.2 C30.2 JP11.2 JP11.21 JP11.GND@0 JP11.GND@2 U6.14 U6.15 U6.16 U6.17 U6.18 U6.19 U6.20
GND6: C31.2 C32.2 C33.2 C34.2 C35.2 JP13.2 JP13.21 JP13.GND@0 JP13.GND@2 U7.14 U7.15 U7.16 U7.17 U7.18 U7.19 U7.20
GND7: C36.2 C37.2 C38.2 C39.2 C40.2 JP15.2 JP15.21 JP15.GND@0 JP15.GND@2 U8.14 U8.15 U8.16 U8.17 U8.18 U8.19 U8.20
GND8: C41.2 C42.2 C43.2 C44.2 C45.2 JP17.2 JP17.21 JP17.GND@0 JP17.GND@2 U9.14 U9.15 U9.16 U9.17 U9.18 U9.19 U9.20
GND9: C46.2 C47.2 C48.2 C49.2 C50.2 JP19.2 JP19.21 JP19.GND@0 JP19.GND@2 U10.14 U10.15 U10.16 U10.17 U10.18 U10.19 U10.20
GND10: C51.2 C52.2 C53.2 C54.2 C55.2 JP21.2 JP21.21 JP21.GND@0 JP21.GND@2 U11.14 U11.15 U11.16 U11.17 U11.18 U11.19 U11.20
GND11: C56.2 C57.2 C58.2 C59.2 C60.2 JP23.2 JP23.21 JP23.GND@0 JP23.GND@2 U12.14 U12.15 U12.16 U12.17 U12.18 U12.19 U12.20
INT1_A/G: JP2.3 U1.11
INT1_A/G1: JP4.3 U2.11
INT1_A/G2: JP6.3 U3.11
INT1_A/G3: JP8.3 U4.11
INT1_A/G4: JP10.3 U5.11
INT1_A/G5: JP12.3 U6.11
INT1_A/G6: JP14.3 U7.11
INT1_A/G7: JP16.3 U8.11
INT1_A/G8: JP18.3 U9.11
INT1_A/G9: JP20.3 U10.11
INT1_A/G10: JP22.3 U11.11
INT1_A/G11: JP24.3 U12.11
INT2_A/G: JP2.4 U1.12
INT2_A/G1: JP4.4 U2.12
INT2_A/G2: JP6.4 U3.12
INT2_A/G3: JP8.4 U4.12
INT2_A/G4: JP10.4 U5.12
INT2_A/G5: JP12.4 U6.12
INT2_A/G6: JP14.4 U7.12
INT2_A/G7: JP16.4 U8.12
INT2_A/G8: JP18.4 U9.12
INT2_A/G9: JP20.4 U10.12
INT2_A/G10: JP22.4 U11.12
INT2_A/G11: JP24.4 U12.12
INT_M: JP2.2 U1.10
INT_M1: JP4.2 U2.10
INT_M2: JP6.2 U3.10
INT_M3: JP8.2 U4.10
INT_M4: JP10.2 U5.10
INT_M5: JP12.2 U6.10
INT_M6: JP14.2 U7.10
INT_M7: JP16.2 U8.10
INT_M8: JP18.2 U9.10
INT_M9: JP20.2 U10.10
INT_M10: JP22.2 U11.10
INT_M11: JP24.2 U12.10
MISO: JP1.8 JP1.A4 SJ5.1 SJ6.1
MISO1: JP3.8 JP3.A4 SJ9.1 SJ10.1
MISO2: JP5.8 JP5.A4 SJ15.1 SJ16.1
MISO3: JP7.8 JP7.A4 SJ21.1 SJ22.1
MISO4: JP9.8 JP9.A4 SJ27.1 SJ28.1
MISO5: JP11.8 JP11.A4 SJ33.1 SJ34.1
MISO6: JP13.8 JP13.A4 SJ39.1 SJ40.1
MISO7: JP15.8 JP15.A4 SJ45.1 SJ46.1
MISO8: JP17.8 JP17.A4 SJ51.1 SJ52.1
MISO9: JP19.8 JP19.A4 SJ57.1 SJ58.1
MISO10: JP21.8 JP21.A4 SJ63.1 SJ64.1
MISO11: JP23.8 JP23.A4 SJ69.1 SJ70.1
MOSI: JP1.7 JP1.A5 SJ8.1
MOSI1: JP3.7 JP3.A5 SJ12.1
MOSI2: JP5.7 JP5.A5 SJ18.1
MOSI3: JP7.7 JP7.A5 SJ24.1
MOSI4: JP9.7 JP9.A5 SJ30.1
MOSI5: JP11.7 JP11.A5 SJ36.1
MOSI6: JP13.7 JP13.A5 SJ42.1
MOSI7: JP15.7 JP15.A5 SJ48.1
MOSI8: JP17.7 JP17.A5 SJ54.1
MOSI9: JP19.7 JP19.A5 SJ60.1
MOSI10: JP21.7 JP21.A5 SJ66.1
MOSI11: JP23.7 JP23.A5 SJ72.1
N$1: C10.1 U2.21
N$2: C8.1 U2.24
N$3: C5.1 U1.21
N$4: C3.1 U1.24
N$5: C15.1 U3.21
N$6: C13.1 U3.24
N$7: C20.1 U4.21
N$8: C18.1 U4.24
N$9: C25.1 U5.21
N$10: C23.1 U5.24
N$11: C30.1 U6.21
N$12: C28.1 U6.24
N$13: C35.1 U7.21
N$14: C33.1 U7.24
N$15: C40.1 U8.21
N$16: C38.1 U8.24
N$17: C45.1 U9.21
N$18: C43.1 U9.24
N$19: C50.1 U10.21
N$20: C48.1 U10.24
N$21: C55.1 U11.21
N$22: C53.1 U11.24
N$23: C60.1 U12.21
N$24: C58.1 U12.24
SCK: JP1.9 JP1.A3 SJ7.1
SCK1: JP3.9 JP3.A3 SJ11.1
SCK2: JP5.9 JP5.A3 SJ17.1
SCK3: JP7.9 JP7.A3 SJ23.1
SCK4: JP9.9 JP9.A3 SJ29.1
SCK5: JP11.9 JP11.A3 SJ35.1
SCK6: JP13.9 JP13.A3 SJ41.1
SCK7: JP15.9 JP15.A3 SJ47.1
SCK8: JP17.9 JP17.A3 SJ53.1
SCK9: JP19.9 JP19.A3 SJ59.1
SCK10: JP21.9 JP21.A3 SJ65.1
SCK11: JP23.9 JP23.A3 SJ71.1
SCL: JP1.14 JP1.D1 R5.2 SJ7.2 SJ7.3 U1.2
SCL1: JP3.14 JP3.D1 R11.2 SJ11.2 SJ11.3 U2.2
SCL2: JP5.14 JP5.D1 R17.2 SJ17.2 SJ17.3 U3.2
SCL3: JP7.14 JP7.D1 R23.2 SJ23.2 SJ23.3 U4.2
SCL4: JP9.14 JP9.D1 R29.2 SJ29.2 SJ29.3 U5.2
SCL5: JP11.14 JP11.D1 R35.2 SJ35.2 SJ35.3 U6.2
SCL6: JP13.14 JP13.D1 R41.2 SJ41.2 SJ41.3 U7.2
SCL7: JP15.14 JP15.D1 R47.2 SJ47.2 SJ47.3 U8.2
SCL8: JP17.14 JP17.D1 R53.2 SJ53.2 SJ53.3 U9.2
SCL9: JP19.14 JP19.D1 R59.2 SJ59.2 SJ59.3 U10.2
SCL10: JP21.14 JP21.D1 R65.2 SJ65.2 SJ65.3 U11.2
SCL11: JP23.14 JP23.D1 R71.2 SJ71.2 SJ71.3 U12.2
SDA: JP1.13 JP1.D0 R6.2 SJ8.2 SJ8.3 U1.4
SDA1: JP3.13 JP3.D0 R12.2 SJ12.2 SJ12.3 U2.4
SDA2: JP5.13 JP5.D0 R18.2 SJ18.2 SJ18.3 U3.4
SDA3: JP7.13 JP7.D0 R24.2 SJ24.2 SJ24.3 U4.4
SDA4: JP9.13 JP9.D0 R30.2 SJ30.2 SJ30.3 U5.4
SDA5: JP11.13 JP11.D0 R36.2 SJ36.2 SJ36.3 U6.4
SDA6: JP13.13 JP13.D0 R42.2 SJ42.2 SJ42.3 U7.4
SDA7: JP15.13 JP15.D0 R48.2 SJ48.2 SJ48.3 U8.4
SDA8: JP17.13 JP17.D0 R54.2 SJ54.2 SJ54.3 U9.4
SDA9: JP19.13 JP19.D0 R60.2 SJ60.2 SJ60.3 U10.4
SDA10: JP21.13 JP21.D0 R66.2 SJ66.2 SJ66.3 U11.4
SDA11: JP23.13 JP23.D0 R72.2 SJ72.2 SJ72.3 U12.4
SDO_A/G: R3.2 SJ5.2 SJ5.3 U1.5
SDO_A/G1: R9.2 SJ9.2 SJ9.3 U2.5
SDO_A/G2: R15.2 SJ15.2 SJ15.3 U3.5
SDO_A/G3: R21.2 SJ21.2 SJ21.3 U4.5
SDO_A/G4: R27.2 SJ27.2 SJ27.3 U5.5
SDO_A/G5: R33.2 SJ33.2 SJ33.3 U6.5
SDO_A/G6: R39.2 SJ39.2 SJ39.3 U7.5
SDO_A/G7: R45.2 SJ45.2 SJ45.3 U8.5
SDO_A/G8: R51.2 SJ51.2 SJ51.3 U9.5
SDO_A/G9: R57.2 SJ57.2 SJ57.3 U10.5
SDO_A/G10: R63.2 SJ63.2 SJ63.3 U11.5
SDO_A/G11: R69.2 SJ69.2 SJ69.3 U12.5
SDO_M: R4.2 SJ6.2 SJ6.3 U1.6
SDO_M1: R10.2 SJ10.2 SJ10.3 U2.6
SDO_M2: R16.2 SJ16.2 SJ16.3 U3.6
SDO_M3: R22.2 SJ22.2 SJ22.3 U4.6
SDO_M4: R28.2 SJ28.2 SJ28.3 U5.6
SDO_M5: R34.2 SJ34.2 SJ34.3 U6.6
SDO_M6: R40.2 SJ40.2 SJ40.3 U7.6
SDO_M7: R46.2 SJ46.2 SJ46.3 U8.6
SDO_M8: R52.2 SJ52.2 SJ52.3 U9.6
SDO_M9: R58.2 SJ58.2 SJ58.3 U10.6
SDO_M10: R64.2 SJ64.2 SJ64.3 U11.6
SDO_M11: R70.2 SJ70.2 SJ70.3 U12.6
SS: JP1.10 JP1.A2 SJ1.1
SS1: JP3.10 JP3.A2 SJ3.1
SS2: JP1.11 JP1.A1 SJ4.1
SS3: JP3.11 JP3.A1 SJ2.1
SS4: JP5.10 JP5.A2 SJ14.1
SS5: JP5.11 JP5.A1 SJ13.1
SS6: JP7.10 JP7.A2 SJ20.1
SS7: JP7.11 JP7.A1 SJ19.1
SS8: JP9.10 JP9.A2 SJ26.1
SS9: JP9.11 JP9.A1 SJ25.1
SS10: JP11.10 JP11.A2 SJ32.1
SS11: JP11.11 JP11.A1 SJ31.1
SS12: JP13.10 JP13.A2 SJ38.1
SS13: JP13.11 JP13.A1 SJ37.1
SS14: JP15.10 JP15.A2 SJ44.1
SS15: JP15.11 JP15.A1 SJ43.1
SS16: JP17.10 JP17.A2 SJ50.1
SS17: JP17.11 JP17.A1 SJ49.1
SS18: JP19.10 JP19.A2 SJ56.1
SS19: JP19.11 JP19.A1 SJ55.1
SS20: JP21.10 JP21.A2 SJ62.1
SS21: JP21.11 JP21.A1 SJ61.1
SS22: JP23.10 JP23.A2 SJ68.1
SS23: JP23.11 JP23.A1 SJ67.1
VBAT: JP1.22 JP1.VBAT
VBAT1: JP3.22 JP3.VBAT
VBAT2: JP5.22 JP5.VBAT
VBAT3: JP7.22 JP7.VBAT
VBAT4: JP9.22 JP9.VBAT
VBAT5: JP11.22 JP11.VBAT
VBAT6: JP13.22 JP13.VBAT
VBAT7: JP15.22 JP15.VBAT
VBAT8: JP17.22 JP17.VBAT
VBAT9: JP19.22 JP19.VBAT
VBAT10: JP21.22 JP21.VBAT
VBAT11: JP23.22 JP23.VBAT
VDD: C1.1 C2.1 C4.1 JP1.3V3 JP1.24 R1.1 R2.1 R3.1 R4.1 R5.1 R6.1 U1.1 U1.3 U1.22 U1.23
VDD1: C6.1 C7.1 C9.1 JP3.3V3 JP3.24 R7.1 R8.1 R9.1 R10.1 R11.1 R12.1 U2.1 U2.3 U2.22 U2.23
VDD2: C11.1 C12.1 C14.1 JP5.3V3 JP5.24 R13.1 R14.1 R15.1 R16.1 R17.1 R18.1 U3.1 U3.3 U3.22 U3.23
VDD3: C16.1 C17.1 C19.1 JP7.3V3 JP7.24 R19.1 R20.1 R21.1 R22.1 R23.1 R24.1 U4.1 U4.3 U4.22 U4.23
VDD4: C21.1 C22.1 C24.1 JP9.3V3 JP9.24 R25.1 R26.1 R27.1 R28.1 R29.1 R30.1 U5.1 U5.3 U5.22 U5.23
VDD5: C26.1 C27.1 C29.1 JP11.3V3 JP11.24 R31.1 R32.1 R33.1 R34.1 R35.1 R36.1 U6.1 U6.3 U6.22 U6.23
VDD6: C31.1 C32.1 C34.1 JP13.3V3 JP13.24 R37.1 R38.1 R39.1 R40.1 R41.1 R42.1 U7.1 U7.3 U7.22 U7.23
VDD7: C36.1 C37.1 C39.1 JP15.3V3 JP15.24 R43.1 R44.1 R45.1 R46.1 R47.1 R48.1 U8.1 U8.3 U8.22 U8.23
VDD8: C41.1 C42.1 C44.1 JP17.3V3 JP17.24 R49.1 R50.1 R51.1 R52.1 R53.1 R54.1 U9.1 U9.3 U9.22 U9.23
VDD9: C46.1 C47.1 C49.1 JP19.3V3 JP19.24 R55.1 R56.1 R57.1 R58.1 R59.1 R60.1 U10.1 U10.3 U10.22 U10.23
VDD10: C51.1 C52.1 C54.1 JP21.3V3 JP21.24 R61.1 R62.1 R63.1 R64.1 R65.1 R66.1 U11.1 U11.3 U11.22 U11.23
VDD11: C56.1 C57.1 C59.1 JP23.3V3 JP23.24 R67.1 R68.1 R69.1 R70.1 R71.1 R72.1 U12.1 U12.3 U12.22 U12.23

## Tracks (layer width: path | path; a pad name or v marks a point on that pad's centre or on a via)
CS_A/G  (via drill 0.51)
  Top 0.203: v24.64,13.21 R1.2 | v29.59,25.02 29.59,28.19 29.14,28.64 U1.7 | v22.1,14.35 20.7,14.35 20.19,14.86 20.19,24 20.83,24.64 24,24.64 v24.64,25.27
  Bottom 0.203: v22.1,14.35 SJ4.2 22.73,12.95 SJ4.3 23.75,12.95 24,13.21 v24.64,13.21 | v24.64,25.27 26.16,25.27 arc-45 26.38,25.18 27.18,24.38 28.82,24.38 arc45 29.05,24.48 v29.59,25.02
CS_A/G1  (via drill 0.51)
  Top 0.203: v65.79,13.21 R7.2 | v70.74,25.02 70.74,28.19 70.29,28.64 U2.7 | v63.25,14.35 61.85,14.35 61.34,14.86 61.34,24 61.98,24.64 65.15,24.64 v65.79,25.27
  Bottom 0.203: v63.25,14.35 SJ2.2 63.88,12.95 SJ2.3 64.9,12.95 65.15,13.21 v65.79,13.21 | v65.79,25.27 67.31,25.27 arc-45 67.53,25.18 68.33,24.38 69.97,24.38 arc45 70.2,24.48 v70.74,25.02
CS_A/G2  (via drill 0.51)
  Top 0.203: v106.93,13.21 R13.2 | v111.89,25.02 111.89,28.19 111.44,28.64 U3.7 | v104.39,14.35 103,14.35 102.49,14.86 102.49,24 103.12,24.64 106.3,24.64 v106.93,25.27
  Bottom 0.203: v104.39,14.35 SJ13.2 105.03,12.95 SJ13.3 106.05,12.95 106.3,13.21 v106.93,13.21 | v106.93,25.27 108.45,25.27 arc-45 108.68,25.18 109.47,24.38 111.12,24.38 arc45 111.34,24.48 v111.89,25.02
CS_A/G3  (via drill 0.51)
  Top 0.203: v24.64,49.28 R19.2 | v29.59,61.09 29.59,64.26 29.14,64.71 U4.7 | v22.1,50.42 20.7,50.42 20.19,50.93 20.19,60.07 20.83,60.71 24,60.71 v24.64,61.34
  Bottom 0.203: v22.1,50.42 SJ19.2 22.73,49.02 SJ19.3 23.75,49.02 24,49.28 v24.64,49.28 | v24.64,61.34 26.16,61.34 arc-45 26.38,61.25 27.18,60.45 28.82,60.45 arc45 29.05,60.55 v29.59,61.09
CS_A/G4  (via drill 0.51)
  Top 0.203: v65.79,49.28 R25.2 | v70.74,61.09 70.74,64.26 70.29,64.71 U5.7 | v63.25,50.42 61.85,50.42 61.34,50.93 61.34,60.07 61.98,60.71 65.15,60.71 v65.79,61.34
  Bottom 0.203: v63.25,50.42 SJ25.2 63.88,49.02 SJ25.3 64.9,49.02 65.15,49.28 v65.79,49.28 | v65.79,61.34 67.31,61.34 arc-45 67.53,61.25 68.33,60.45 69.97,60.45 arc45 70.2,60.55 v70.74,61.09
CS_A/G5  (via drill 0.51)
  Top 0.203: v106.93,49.28 R31.2 | v111.89,61.09 111.89,64.26 111.44,64.71 U6.7 | v104.39,50.42 103,50.42 102.49,50.93 102.49,60.07 103.12,60.71 106.3,60.71 v106.93,61.34
  Bottom 0.203: v104.39,50.42 SJ31.2 105.03,49.02 SJ31.3 106.05,49.02 106.3,49.28 v106.93,49.28 | v106.93,61.34 108.45,61.34 arc-45 108.68,61.25 109.47,60.45 111.12,60.45 arc45 111.34,60.55 v111.89,61.09
CS_A/G6  (via drill 0.51)
  Top 0.203: v24.64,85.34 R37.2 | v29.59,97.16 29.59,100.33 29.14,100.78 U7.7 | v22.1,86.49 20.7,86.49 20.19,87 20.19,96.14 20.83,96.77 24,96.77 v24.64,97.41
  Bottom 0.203: v22.1,86.49 SJ37.2 22.73,85.09 SJ37.3 23.75,85.09 24,85.34 v24.64,85.34 | v24.64,97.41 26.16,97.41 arc-45 26.38,97.32 27.18,96.52 28.82,96.52 arc45 29.05,96.61 v29.59,97.16
CS_A/G7  (via drill 0.51)
  Top 0.203: v65.79,85.34 R43.2 | v70.74,97.16 70.74,100.33 70.29,100.78 U8.7 | v63.25,86.49 61.85,86.49 61.34,87 61.34,96.14 61.98,96.77 65.15,96.77 v65.79,97.41
  Bottom 0.203: v63.25,86.49 SJ43.2 63.88,85.09 SJ43.3 64.9,85.09 65.15,85.34 v65.79,85.34 | v65.79,97.41 67.31,97.41 arc-45 67.53,97.32 68.33,96.52 69.97,96.52 arc45 70.2,96.61 v70.74,97.16
CS_A/G8  (via drill 0.51)
  Top 0.203: v106.93,85.34 R49.2 | v111.89,97.16 111.89,100.33 111.44,100.78 U9.7 | v104.39,86.49 103,86.49 102.49,87 102.49,96.14 103.12,96.77 106.3,96.77 v106.93,97.41
  Bottom 0.203: v104.39,86.49 SJ49.2 105.03,85.09 SJ49.3 106.05,85.09 106.3,85.34 v106.93,85.34 | v106.93,97.41 108.45,97.41 arc-45 108.68,97.32 109.47,96.52 111.12,96.52 arc45 111.34,96.61 v111.89,97.16
CS_A/G9  (via drill 0.51)
  Top 0.203: v24.64,121.41 R55.2 | v29.59,133.22 29.59,136.4 29.14,136.85 U10.7 | v22.1,122.56 20.7,122.56 20.19,123.06 20.19,132.21 20.83,132.84 24,132.84 v24.64,133.48
  Bottom 0.203: v22.1,122.56 SJ55.2 22.73,121.16 SJ55.3 23.75,121.16 24,121.41 v24.64,121.41 | v24.64,133.48 26.16,133.48 arc-45 26.38,133.38 27.18,132.59 28.82,132.59 arc45 29.05,132.68 v29.59,133.22
CS_A/G10  (via drill 0.51)
  Top 0.203: v65.79,121.41 R61.2 | v70.74,133.22 70.74,136.4 70.29,136.85 U11.7 | v63.25,122.56 61.85,122.56 61.34,123.06 61.34,132.21 61.98,132.84 65.15,132.84 v65.79,133.48
  Bottom 0.203: v63.25,122.56 SJ61.2 63.88,121.16 SJ61.3 64.9,121.16 65.15,121.41 v65.79,121.41 | v65.79,133.48 67.31,133.48 arc-45 67.53,133.38 68.33,132.59 69.97,132.59 arc45 70.2,132.68 v70.74,133.22
CS_A/G11  (via drill 0.51)
  Top 0.203: v106.93,121.41 R67.2 | v111.89,133.22 111.89,136.4 111.44,136.85 U12.7 | v104.39,122.56 103,122.56 102.49,123.06 102.49,132.21 103.12,132.84 106.3,132.84 v106.93,133.48
  Bottom 0.203: v104.39,122.56 SJ67.2 105.03,121.16 SJ67.3 106.05,121.16 106.3,121.41 v106.93,121.41 | v106.93,133.48 108.45,133.48 arc-45 108.68,133.38 109.47,132.59 111.12,132.59 arc45 111.34,132.68 v111.89,133.22
CS_M  (via drill 0.51)
  Top 0.203: v24.64,15.75 R2.2 | U1.8 28.41,29.08 30.23,29.08 30.61,28.7 v30.61,21.46 | v24.64,17.02 23.37,17.02 22.86,17.53 22.86,19.05 23.37,19.56 v24.64,19.56
  Bottom 0.203: v24.64,15.75 SJ1.3 22.73,15.75 SJ1.2 22.1,16.64 22.48,17.02 v24.64,17.02 | v30.61,21.46 30.61,20.45 29.72,19.56 v24.64,19.56
CS_M1  (via drill 0.51)
  Top 0.203: v65.79,15.75 R8.2 | U2.8 69.56,29.08 71.37,29.08 71.75,28.7 v71.75,21.46 | v65.79,17.02 64.52,17.02 64.01,17.53 64.01,19.05 64.52,19.56 v65.79,19.56
  Bottom 0.203: v65.79,15.75 SJ3.3 63.88,15.75 SJ3.2 63.25,16.64 63.63,17.02 v65.79,17.02 | v71.75,21.46 71.75,20.45 70.87,19.56 v65.79,19.56
CS_M2  (via drill 0.51)
  Top 0.203: v106.93,15.75 R14.2 | U3.8 110.71,29.08 112.52,29.08 112.9,28.7 v112.9,21.46 | v106.93,17.02 105.66,17.02 105.16,17.53 105.16,19.05 105.66,19.56 v106.93,19.56
  Bottom 0.203: v106.93,15.75 SJ14.3 105.03,15.75 SJ14.2 104.39,16.64 104.78,17.02 v106.93,17.02 | v112.9,21.46 112.9,20.45 112.01,19.56 v106.93,19.56
CS_M3  (via drill 0.51)
  Top 0.203: v24.64,51.82 R20.2 | U4.8 28.41,65.15 30.23,65.15 30.61,64.77 v30.61,57.53 | v24.64,53.09 23.37,53.09 22.86,53.59 22.86,55.12 23.37,55.63 v24.64,55.63
  Bottom 0.203: v24.64,51.82 SJ20.3 22.73,51.82 SJ20.2 22.1,52.7 22.48,53.09 v24.64,53.09 | v30.61,57.53 30.61,56.52 29.72,55.63 v24.64,55.63
CS_M4  (via drill 0.51)
  Top 0.203: v65.79,51.82 R26.2 | U5.8 69.56,65.15 71.37,65.15 71.75,64.77 v71.75,57.53 | v65.79,53.09 64.52,53.09 64.01,53.59 64.01,55.12 64.52,55.63 v65.79,55.63
  Bottom 0.203: v65.79,51.82 SJ26.3 63.88,51.82 SJ26.2 63.25,52.7 63.63,53.09 v65.79,53.09 | v71.75,57.53 71.75,56.52 70.87,55.63 v65.79,55.63
CS_M5  (via drill 0.51)
  Top 0.203: v106.93,51.82 R32.2 | U6.8 112.52,65.15 112.9,64.77 v112.9,57.53 | v106.93,53.09 105.66,53.09 105.16,53.59 105.16,55.12 105.66,55.63 v106.93,55.63
  Bottom 0.203: v106.93,51.82 SJ32.3 105.03,51.82 SJ32.2 104.39,52.7 104.78,53.09 v106.93,53.09 | v112.9,57.53 112.9,56.52 112.01,55.63 v106.93,55.63
CS_M6  (via drill 0.51)
  Top 0.203: v24.64,87.88 R38.2 | U7.8 28.41,101.22 30.23,101.22 30.61,100.84 v30.61,93.6 | v24.64,89.15 23.37,89.15 22.86,89.66 22.86,91.19 23.37,91.69 v24.64,91.69
  Bottom 0.203: v24.64,87.88 SJ38.3 22.73,87.88 SJ38.2 22.1,88.77 22.48,89.15 v24.64,89.15 | v30.61,93.6 30.61,92.58 29.72,91.69 v24.64,91.69
CS_M7  (via drill 0.51)
  Top 0.203: v65.79,87.88 R44.2 | U8.8 69.56,101.22 71.37,101.22 71.75,100.84 v71.75,93.6 | v65.79,89.15 64.52,89.15 64.01,89.66 64.01,91.19 64.52,91.69 v65.79,91.69
  Bottom 0.203: v65.79,87.88 SJ44.3 63.88,87.88 SJ44.2 63.25,88.77 63.63,89.15 v65.79,89.15 | v71.75,93.6 71.75,92.58 70.87,91.69 v65.79,91.69
CS_M8  (via drill 0.51)
  Top 0.203: v106.93,87.88 R50.2 | U9.8 112.52,101.22 112.9,100.84 v112.9,93.6 | v106.93,89.15 105.66,89.15 105.16,89.66 105.16,91.19 105.66,91.69 v106.93,91.69
  Bottom 0.203: v106.93,87.88 SJ50.3 105.03,87.88 SJ50.2 104.39,88.77 104.78,89.15 v106.93,89.15 | v112.9,93.6 112.9,92.58 112.01,91.69 v106.93,91.69
CS_M9  (via drill 0.51)
  Top 0.203: v24.64,123.95 R56.2 | U10.8 28.41,137.29 30.23,137.29 30.61,136.91 v30.61,129.67 | v24.64,125.22 23.37,125.22 22.86,125.73 22.86,127.25 23.37,127.76 v24.64,127.76
  Bottom 0.203: v24.64,123.95 SJ56.3 22.73,123.95 SJ56.2 22.1,124.84 22.48,125.22 v24.64,125.22 | v30.61,129.67 30.61,128.65 29.72,127.76 v24.64,127.76
CS_M10  (via drill 0.51)
  Top 0.203: v65.79,123.95 R62.2 | U11.8 69.56,137.29 71.37,137.29 71.75,136.91 v71.75,129.67 | v65.79,125.22 64.52,125.22 64.01,125.73 64.01,127.25 64.52,127.76 v65.79,127.76
  Bottom 0.203: v65.79,123.95 SJ62.3 63.88,123.95 SJ62.2 63.25,124.84 63.63,125.22 v65.79,125.22 | v71.75,129.67 71.75,128.65 70.87,127.76 v65.79,127.76
CS_M11  (via drill 0.51)
  Top 0.203: v106.93,123.95 R68.2 | U12.8 112.52,137.29 112.9,136.91 v112.9,129.67 | v106.93,125.22 105.66,125.22 105.16,125.73 105.16,127.25 105.66,127.76 v106.93,127.76
  Bottom 0.203: v106.93,123.95 SJ68.3 105.03,123.95 SJ68.2 104.39,124.84 104.78,125.22 v106.93,125.22 | v112.9,129.67 112.9,128.65 112.01,127.76 v106.93,127.76
DEN_A/G
  Top 0.203: U1.13 28.42,31.24 29.08,31.24 29.72,31.88 29.72,33.53 28.45,34.8 25.91,34.8 22.1,38.61 JP2.5
DEN_A/G1
  Top 0.203: U2.13 69.57,31.24 70.23,31.24 70.87,31.88 70.87,33.53 69.6,34.8 67.06,34.8 63.25,38.61 JP4.5
DEN_A/G2
  Top 0.203: U3.13 110.72,31.24 111.38,31.24 112.01,31.88 112.01,33.53 110.74,34.8 108.2,34.8 104.39,38.61 JP6.5
DEN_A/G3
  Top 0.203: U4.13 28.42,67.31 29.08,67.31 29.72,67.94 29.72,69.6 28.45,70.87 25.91,70.87 22.1,74.68 JP8.5
DEN_A/G4
  Top 0.203: U5.13 69.57,67.31 70.23,67.31 70.87,67.94 70.87,69.6 69.6,70.87 67.06,70.87 63.25,74.68 JP10.5
DEN_A/G5
  Top 0.203: U6.13 110.72,67.31 111.38,67.31 112.01,67.94 112.01,69.6 110.74,70.87 108.2,70.87 104.39,74.68 JP12.5
DEN_A/G6
  Top 0.203: U7.13 28.42,103.38 29.08,103.38 29.72,104.01 29.72,105.66 28.45,106.93 25.91,106.93 22.1,110.74 JP14.5
DEN_A/G7
  Top 0.203: U8.13 69.57,103.38 70.23,103.38 70.87,104.01 70.87,105.66 69.6,106.93 67.06,106.93 63.25,110.74 JP16.5
DEN_A/G8
  Top 0.203: U9.13 110.72,103.38 111.38,103.38 112.01,104.01 112.01,105.66 110.74,106.93 108.2,106.93 104.39,110.74 JP18.5
DEN_A/G9
  Top 0.203: U10.13 28.42,139.45 29.08,139.45 29.72,140.08 29.72,141.73 28.45,143 25.91,143 22.1,146.81 JP20.5
DEN_A/G10
  Top 0.203: U11.13 69.57,139.45 70.23,139.45 70.87,140.08 70.87,141.73 69.6,143 67.06,143 63.25,146.81 JP22.5
DEN_A/G11
  Top 0.203: U12.13 110.72,139.45 111.38,139.45 112.01,140.08 112.01,141.73 110.74,143 108.2,143 104.39,146.81 JP24.5
DRDY_M
  Top 0.203: U1.9 32.04,29.5 32.77,30.23 32.77,39.37 32.26,39.88 JP2.1
DRDY_M1
  Top 0.203: U2.9 73.19,29.5 73.91,30.23 73.91,39.37 73.41,39.88 JP4.1
DRDY_M2
  Top 0.203: U3.9 114.34,29.5 115.06,30.23 115.06,39.37 114.55,39.88 JP6.1
DRDY_M3
  Top 0.203: U4.9 32.04,65.57 32.77,66.29 32.77,75.44 32.26,75.95 JP8.1
DRDY_M4
  Top 0.203: U5.9 73.19,65.57 73.91,66.29 73.91,75.44 73.41,75.95 JP10.1
DRDY_M5
  Top 0.203: U6.9 114.34,65.57 115.06,66.29 115.06,75.44 114.55,75.95 JP12.1
DRDY_M6
  Top 0.203: U7.9 32.04,101.64 32.77,102.36 32.77,111.51 32.26,112.01 JP14.1
DRDY_M7
  Top 0.203: U8.9 73.19,101.64 73.91,102.36 73.91,111.51 73.41,112.01 JP16.1
DRDY_M8
  Top 0.203: U9.9 114.34,101.64 115.06,102.36 115.06,111.51 114.55,112.01 JP18.1
DRDY_M9
  Top 0.203: U10.9 32.04,137.71 32.77,138.43 32.77,147.57 32.26,148.08 JP20.1
DRDY_M10
  Top 0.203: U11.9 73.19,137.71 73.91,138.43 73.91,147.57 73.41,148.08 JP22.1
DRDY_M11
  Top 0.203: U12.9 114.34,137.71 115.06,138.43 115.06,147.57 114.55,148.08 JP24.1
GND  (via drill 0.51)
  Top 0.203: U1.14 27.81,31.2 27.81,31.88 27.39,31.88 | 26.96,31.88 26.54,31.88 | 26.54,31.88 26.53,31.87 U1.17 | U1.16 26.96,31.88 | U1.15 27.39,31.88 | 27.39,31.88 27.18,31.88 | 27.18,31.88 26.96,31.88 | U1.20 25.26,30.36 25.15,30.48 25.15,30.73 | C4.2 C1.2 | C1.2 21.25,33.11 JP1.2 | v27.18,32.89 27.18,31.88 | v19.56,32.26 19.56,30.99 20.57,29.97 C1.2 | 25.15,30.73 25.15,31.24 | 25.15,31.24 25.15,31.62 25.4,31.88 26.54,31.88 | U1.19 25.2,30.79 25.15,30.73 | U1.18 25.16,31.22 25.15,31.24
  Top 0.305: C2.2 C3.2 C1.2 C5.2
  Bottom 0.203: v19.56,32.26 24.64,32.26 25.27,32.89 v27.18,32.89 34.16,32.89 JP1.21
  other vias: 32.64,22.86 29.34,22.73
  pour Top (isolate 0.305): 6.86,6.86 47.5,6.86 47.5,42.42 6.86,42.42
  pour Bottom (isolate 0.305): 6.86,6.86 47.5,6.86 47.5,42.42 6.86,42.42
GND1  (via drill 0.51)
  Top 0.203: U2.14 68.96,31.2 68.96,31.88 68.54,31.88 | 68.11,31.88 67.69,31.88 | 67.69,31.88 67.68,31.87 U2.17 | U2.16 68.11,31.88 | U2.15 68.54,31.88 | 68.54,31.88 68.33,31.88 | 68.33,31.88 68.11,31.88 | U2.20 66.41,30.36 66.29,30.48 66.29,30.73 | C9.2 C6.2 | C6.2 62.4,33.11 JP3.2 | v68.33,32.89 68.33,31.88 | v60.71,32.26 60.71,30.99 61.72,29.97 C6.2 | 66.29,30.73 66.29,31.24 | 66.29,31.24 66.29,31.62 66.55,31.88 67.69,31.88 | U2.19 66.35,30.79 66.29,30.73 | U2.18 66.31,31.22 66.29,31.24
  Top 0.305: C7.2 C8.2 C6.2 C10.2
  Bottom 0.203: v60.71,32.26 65.79,32.26 66.42,32.89 v68.33,32.89 75.31,32.89 JP3.21
  other vias: 73.79,22.86 70.48,22.73
  pour Top (isolate 0.305): 48.01,6.86 88.65,6.86 88.65,42.42 48.01,42.42
  pour Bottom (isolate 0.305): 48.01,6.86 88.65,6.86 88.65,42.42 48.01,42.42
GND2  (via drill 0.51)
  Top 0.203: U3.14 110.11,31.2 110.11,31.88 109.69,31.88 | 109.26,31.88 108.84,31.88 | 108.84,31.88 108.83,31.87 U3.17 | U3.16 109.26,31.88 | U3.15 109.69,31.88 | 109.69,31.88 109.47,31.88 | 109.47,31.88 109.26,31.88 | U3.20 107.56,30.36 107.44,30.48 107.44,30.73 | C14.2 C11.2 | C11.2 103.54,33.11 JP5.2 | v109.47,32.89 109.47,31.88 | v101.85,32.26 101.85,30.99 102.87,29.97 C11.2 | 107.44,30.73 107.44,31.24 | 107.44,31.24 107.44,31.62 107.7,31.88 108.84,31.88 | U3.19 107.5,30.79 107.44,30.73 | U3.18 107.46,31.22 107.44,31.24
  Top 0.305: C12.2 C13.2 C11.2 C15.2
  Bottom 0.203: v101.85,32.26 106.93,32.26 107.57,32.89 v109.47,32.89 116.46,32.89 JP5.21
  other vias: 114.94,22.86 111.63,22.73
  pour Top (isolate 0.305): 89.15,6.86 129.79,6.86 129.79,42.42 89.15,42.42
  pour Bottom (isolate 0.305): 89.15,6.86 129.79,6.86 129.79,42.42 89.15,42.42
GND3  (via drill 0.51)
  Top 0.203: U4.14 27.81,67.27 27.81,67.94 27.39,67.94 | 26.96,67.94 26.54,67.94 | 26.54,67.94 26.53,67.94 U4.17 | U4.16 26.96,67.94 | U4.15 27.39,67.94 | 27.39,67.94 27.18,67.94 | 27.18,67.94 26.96,67.94 | U4.20 25.26,66.43 25.15,66.55 25.15,66.8 | C19.2 C16.2 | C16.2 21.25,69.18 JP7.2 | v27.18,68.96 27.18,67.94 | v19.56,68.33 19.56,67.06 20.57,66.04 C16.2 | 25.15,66.8 25.15,67.31 | 25.15,67.31 25.15,67.69 25.4,67.94 26.54,67.94 | U4.19 25.2,66.86 25.15,66.8 | U4.18 25.16,67.29 25.15,67.31
  Top 0.305: C17.2 C18.2 C16.2 C20.2
  Bottom 0.203: v19.56,68.33 24.64,68.33 25.27,68.96 v27.18,68.96 34.16,68.96 JP7.21
  other vias: 32.64,58.93 29.34,58.8
  pour Top (isolate 0.305): 6.86,42.93 47.5,42.93 47.5,78.49 6.86,78.49
  pour Bottom (isolate 0.305): 6.86,42.93 47.5,42.93 47.5,78.49 6.86,78.49
GND4  (via drill 0.51)
  Top 0.203: U5.14 68.96,67.27 68.96,67.94 68.54,67.94 | 68.11,67.94 67.69,67.94 | 67.69,67.94 67.68,67.94 U5.17 | U5.16 68.11,67.94 | U5.15 68.54,67.94 | 68.54,67.94 68.33,67.94 | 68.33,67.94 68.11,67.94 | U5.20 66.41,66.43 66.29,66.55 66.29,66.8 | C24.2 C21.2 | C21.2 62.4,69.18 JP9.2 | v68.33,68.96 68.33,67.94 | v60.71,68.33 60.71,67.06 61.72,66.04 C21.2 | 66.29,66.8 66.29,67.31 | 66.29,67.31 66.29,67.69 66.55,67.94 67.69,67.94 | U5.19 66.35,66.86 66.29,66.8 | U5.18 66.31,67.29 66.29,67.31
  Top 0.305: C22.2 C23.2 C21.2 C25.2
  Bottom 0.203: v60.71,68.33 65.79,68.33 66.42,68.96 v68.33,68.96 75.31,68.96 JP9.21
  other vias: 73.79,58.93 70.48,58.8
  pour Top (isolate 0.305): 48.01,42.93 88.65,42.93 88.65,78.49 48.01,78.49
  pour Bottom (isolate 0.305): 48.01,42.93 88.65,42.93 88.65,78.49 48.01,78.49
GND5  (via drill 0.51)
  Top 0.203: U6.14 110.11,67.27 110.11,67.94 109.69,67.94 | 109.26,67.94 108.84,67.94 | 108.84,67.94 108.83,67.94 U6.17 | U6.16 109.26,67.94 | U6.15 109.69,67.94 | 109.69,67.94 109.47,67.94 | 109.47,67.94 109.26,67.94 | U6.20 107.56,66.43 107.44,66.55 107.44,66.8 | C29.2 C26.2 | C26.2 103.54,69.18 JP11.2 | v109.47,68.96 109.47,67.94 | v101.85,68.33 101.85,67.06 102.87,66.04 C26.2 | 107.44,66.8 107.44,67.31 | 107.44,67.31 107.44,67.69 107.7,67.94 108.84,67.94 | U6.19 107.5,66.86 107.44,66.8 | U6.18 107.46,67.29 107.44,67.31
  Top 0.305: C27.2 C28.2 C26.2 C30.2
  Bottom 0.203: v101.85,68.33 106.93,68.33 107.57,68.96 v109.47,68.96 116.46,68.96 JP11.21
  other vias: 114.94,58.93 111.63,58.8
  pour Top (isolate 0.305): 89.15,42.93 129.79,42.93 129.79,78.49 89.15,78.49
  pour Bottom (isolate 0.305): 89.15,42.93 129.79,42.93 129.79,78.49 89.15,78.49
GND6  (via drill 0.51)
  Top 0.203: U7.14 27.81,104.01 27.39,104.01 | 26.96,104.01 26.54,104.01 | 26.54,104.01 26.53,104 U7.17 | U7.16 26.96,104.01 | U7.15 27.39,104.01 | 27.39,104.01 27.18,104.01 | 27.18,104.01 26.96,104.01 | U7.20 25.26,102.5 25.15,102.62 25.15,102.87 | C34.2 C31.2 | C31.2 21.25,105.24 JP13.2 | v27.18,105.03 27.18,104.01 | v19.56,104.39 19.56,103.12 20.57,102.11 C31.2 | 25.15,102.87 25.15,103.38 | 25.15,103.38 25.15,103.76 25.4,104.01 26.54,104.01 | U7.19 25.2,102.93 25.15,102.87 | U7.18 25.16,103.36 25.15,103.38
  Top 0.305: C32.2 C33.2 C31.2 C35.2
  Bottom 0.203: v19.56,104.39 24.64,104.39 25.27,105.03 v27.18,105.03 34.16,105.03 JP13.21
  other vias: 32.64,95 29.34,94.87
  pour Top (isolate 0.305): 6.86,78.99 47.5,78.99 47.5,114.55 6.86,114.55
  pour Bottom (isolate 0.305): 6.86,78.99 47.5,78.99 47.5,114.55 6.86,114.55
GND7  (via drill 0.51)
  Top 0.203: U8.14 68.96,104.01 68.54,104.01 | 68.11,104.01 67.69,104.01 | 67.69,104.01 67.68,104 U8.17 | U8.16 68.11,104.01 | U8.15 68.54,104.01 | 68.54,104.01 68.33,104.01 | 68.33,104.01 68.11,104.01 | U8.20 66.41,102.5 66.29,102.62 66.29,102.87 | C39.2 C36.2 | C36.2 62.4,105.24 JP15.2 | v68.33,105.03 68.33,104.01 | v60.71,104.39 60.71,103.12 61.72,102.11 C36.2 | 66.29,102.87 66.29,103.38 | 66.29,103.38 66.29,103.76 66.55,104.01 67.69,104.01 | U8.19 66.35,102.93 66.29,102.87 | U8.18 66.31,103.36 66.29,103.38
  Top 0.305: C37.2 C38.2 C36.2 C40.2
  Bottom 0.203: v60.71,104.39 65.79,104.39 66.42,105.03 v68.33,105.03 75.31,105.03 JP15.21
  other vias: 73.79,95 70.48,94.87
  pour Top (isolate 0.305): 48.01,78.99 88.65,78.99 88.65,114.55 48.01,114.55
  pour Bottom (isolate 0.305): 48.01,78.99 88.65,78.99 88.65,114.55 48.01,114.55
GND8  (via drill 0.51)
  Top 0.203: U9.14 110.11,103.34 110.11,104.01 109.69,104.01 | 109.26,104.01 108.84,104.01 | 108.84,104.01 108.83,104 U9.17 | U9.16 109.26,104.01 | U9.15 109.69,104.01 | 109.69,104.01 109.47,104.01 | 109.47,104.01 109.26,104.01 | U9.20 107.56,102.5 107.44,102.62 107.44,102.87 | C44.2 C41.2 | C41.2 103.54,105.24 JP17.2 | v109.47,105.03 109.47,104.01 | v101.85,104.39 101.85,103.12 102.87,102.11 C41.2 | 107.44,102.87 107.44,103.38 | 107.44,103.38 107.44,103.76 107.7,104.01 108.84,104.01 | U9.19 107.5,102.93 107.44,102.87 | U9.18 107.46,103.36 107.44,103.38
  Top 0.305: C42.2 C43.2 C41.2 C45.2
  Bottom 0.203: v101.85,104.39 106.93,104.39 107.57,105.03 v109.47,105.03 116.46,105.03 JP17.21
  other vias: 114.94,95 111.63,94.87
  pour Top (isolate 0.305): 89.15,78.99 129.79,78.99 129.79,114.55 89.15,114.55
  pour Bottom (isolate 0.305): 89.15,78.99 129.79,78.99 129.79,114.55 89.15,114.55
GND9  (via drill 0.51)
  Top 0.203: U10.14 27.81,140.08 27.39,140.08 | 26.96,140.08 26.54,140.08 | 26.54,140.08 26.53,140.07 U10.17 | U10.16 26.96,140.08 | U10.15 27.39,140.08 | 27.39,140.08 27.18,140.08 | 27.18,140.08 26.96,140.08 | 25.94,138.56 U10.20 25.26,138.57 25.15,138.68 25.15,138.94 | C49.2 C46.2 | C46.2 21.25,141.31 JP19.2 | v27.18,141.1 27.18,140.08 | v19.56,140.46 19.56,139.19 20.57,138.18 C46.2 | 25.15,138.94 25.15,139.45 | 25.15,139.45 25.15,139.83 25.4,140.08 26.54,140.08 | U10.19 25.2,139 25.15,138.94 | U10.18 25.16,139.43 25.15,139.45
  Top 0.305: C47.2 C48.2 C46.2 C50.2
  Bottom 0.203: v19.56,140.46 24.64,140.46 25.27,141.1 v27.18,141.1 34.16,141.1 JP19.21
  other vias: 32.64,131.06 29.34,130.94
  pour Top (isolate 0.305): 6.86,115.06 47.5,115.06 47.5,150.62 6.86,150.62
  pour Bottom (isolate 0.305): 6.86,115.06 47.5,115.06 47.5,150.62 6.86,150.62
GND10  (via drill 0.51)
  Top 0.203: U11.14 68.96,140.08 68.54,140.08 | 68.11,140.08 67.69,140.08 | 67.69,140.08 67.68,140.07 U11.17 | U11.16 68.11,140.08 | U11.15 68.54,140.08 | 68.54,140.08 68.33,140.08 | 68.33,140.08 68.11,140.08 | 67.09,138.56 U11.20 66.41,138.57 66.29,138.68 66.29,138.94 | C54.2 C51.2 | C51.2 62.4,141.31 JP21.2 | v68.33,141.1 68.33,140.08 | v60.71,140.46 60.71,139.19 61.72,138.18 C51.2 | 66.29,138.94 66.29,139.45 | 66.29,139.45 66.29,139.83 66.55,140.08 67.69,140.08 | U11.19 66.35,139 66.29,138.94 | U11.18 66.31,139.43 66.29,139.45
  Top 0.305: C52.2 C53.2 C51.2 C55.2